# Altium PCB Power_BMS.PcbDoc (part 1 of 2)
Units mil, origin at the board's own origin, x right, y up, seen from the top; angles counter-clockwise.
Board outline 2370.27 x 1975.23 mil, 6 copper layers (Top Layer, Layer 1, GND, Power, Layer 2, Bottom Layer), stack 30.734 mil thick; 97 components, 67 nets, 345 pads, 132 vias.
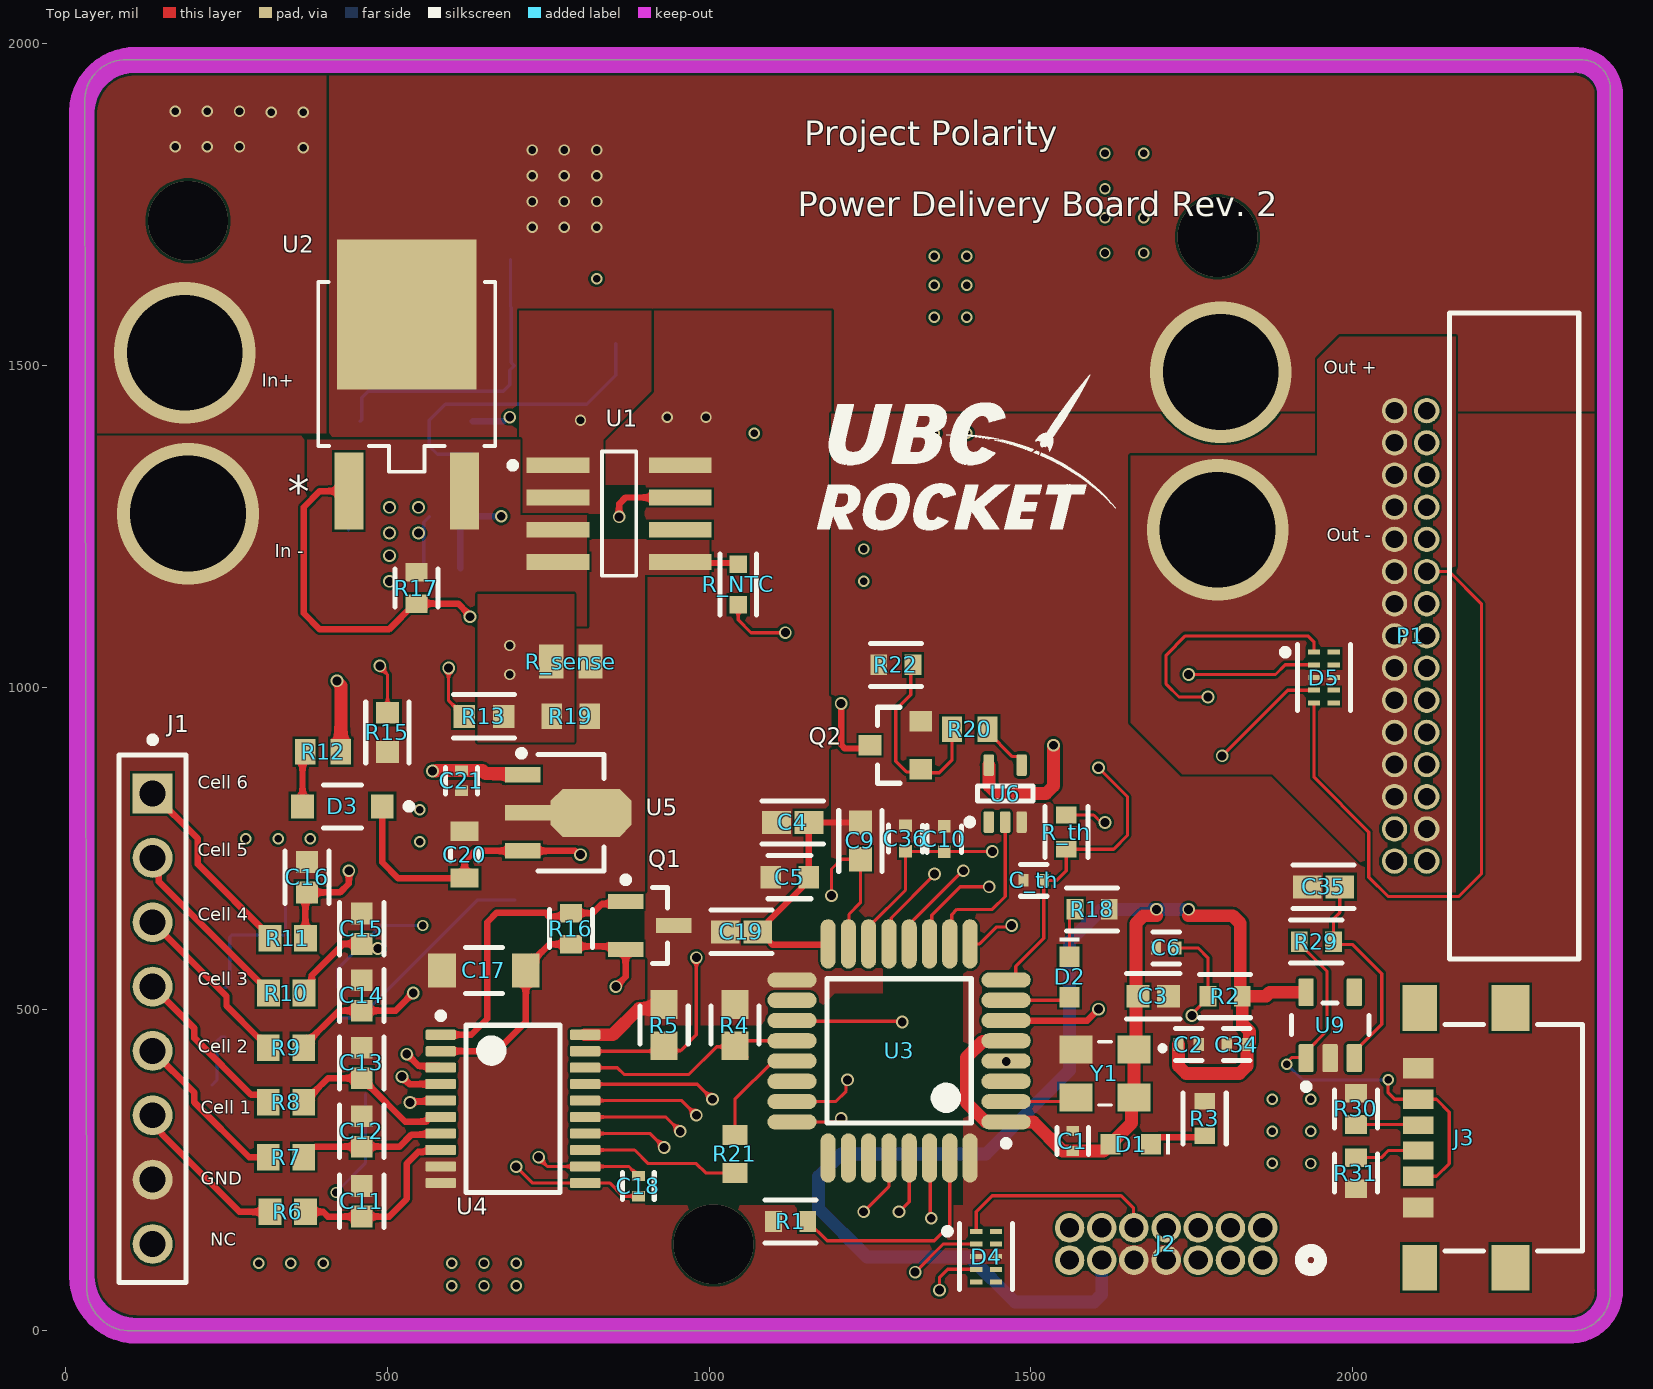
[diagram p0: Top Layer view]
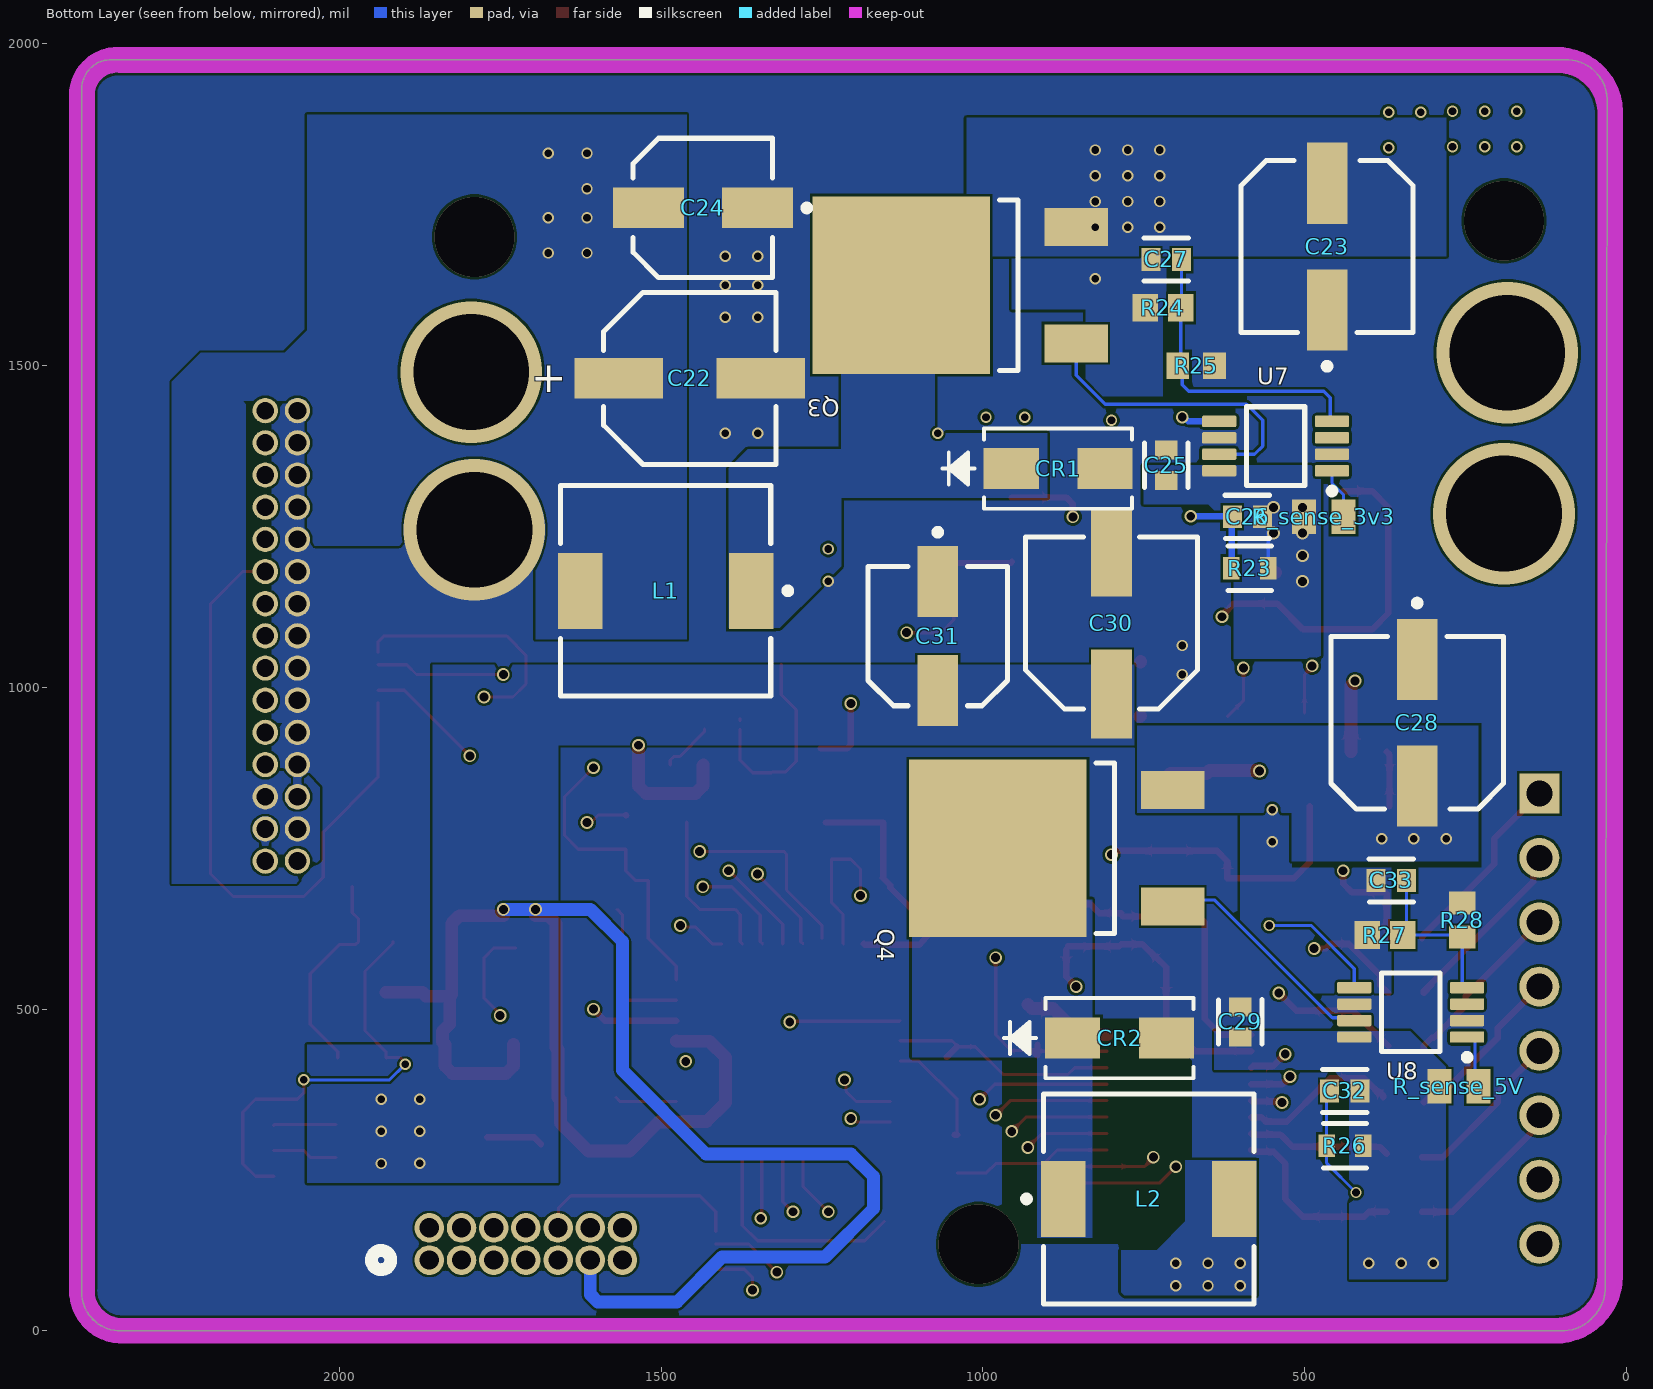
[diagram p1: Bottom Layer view, seen from below]
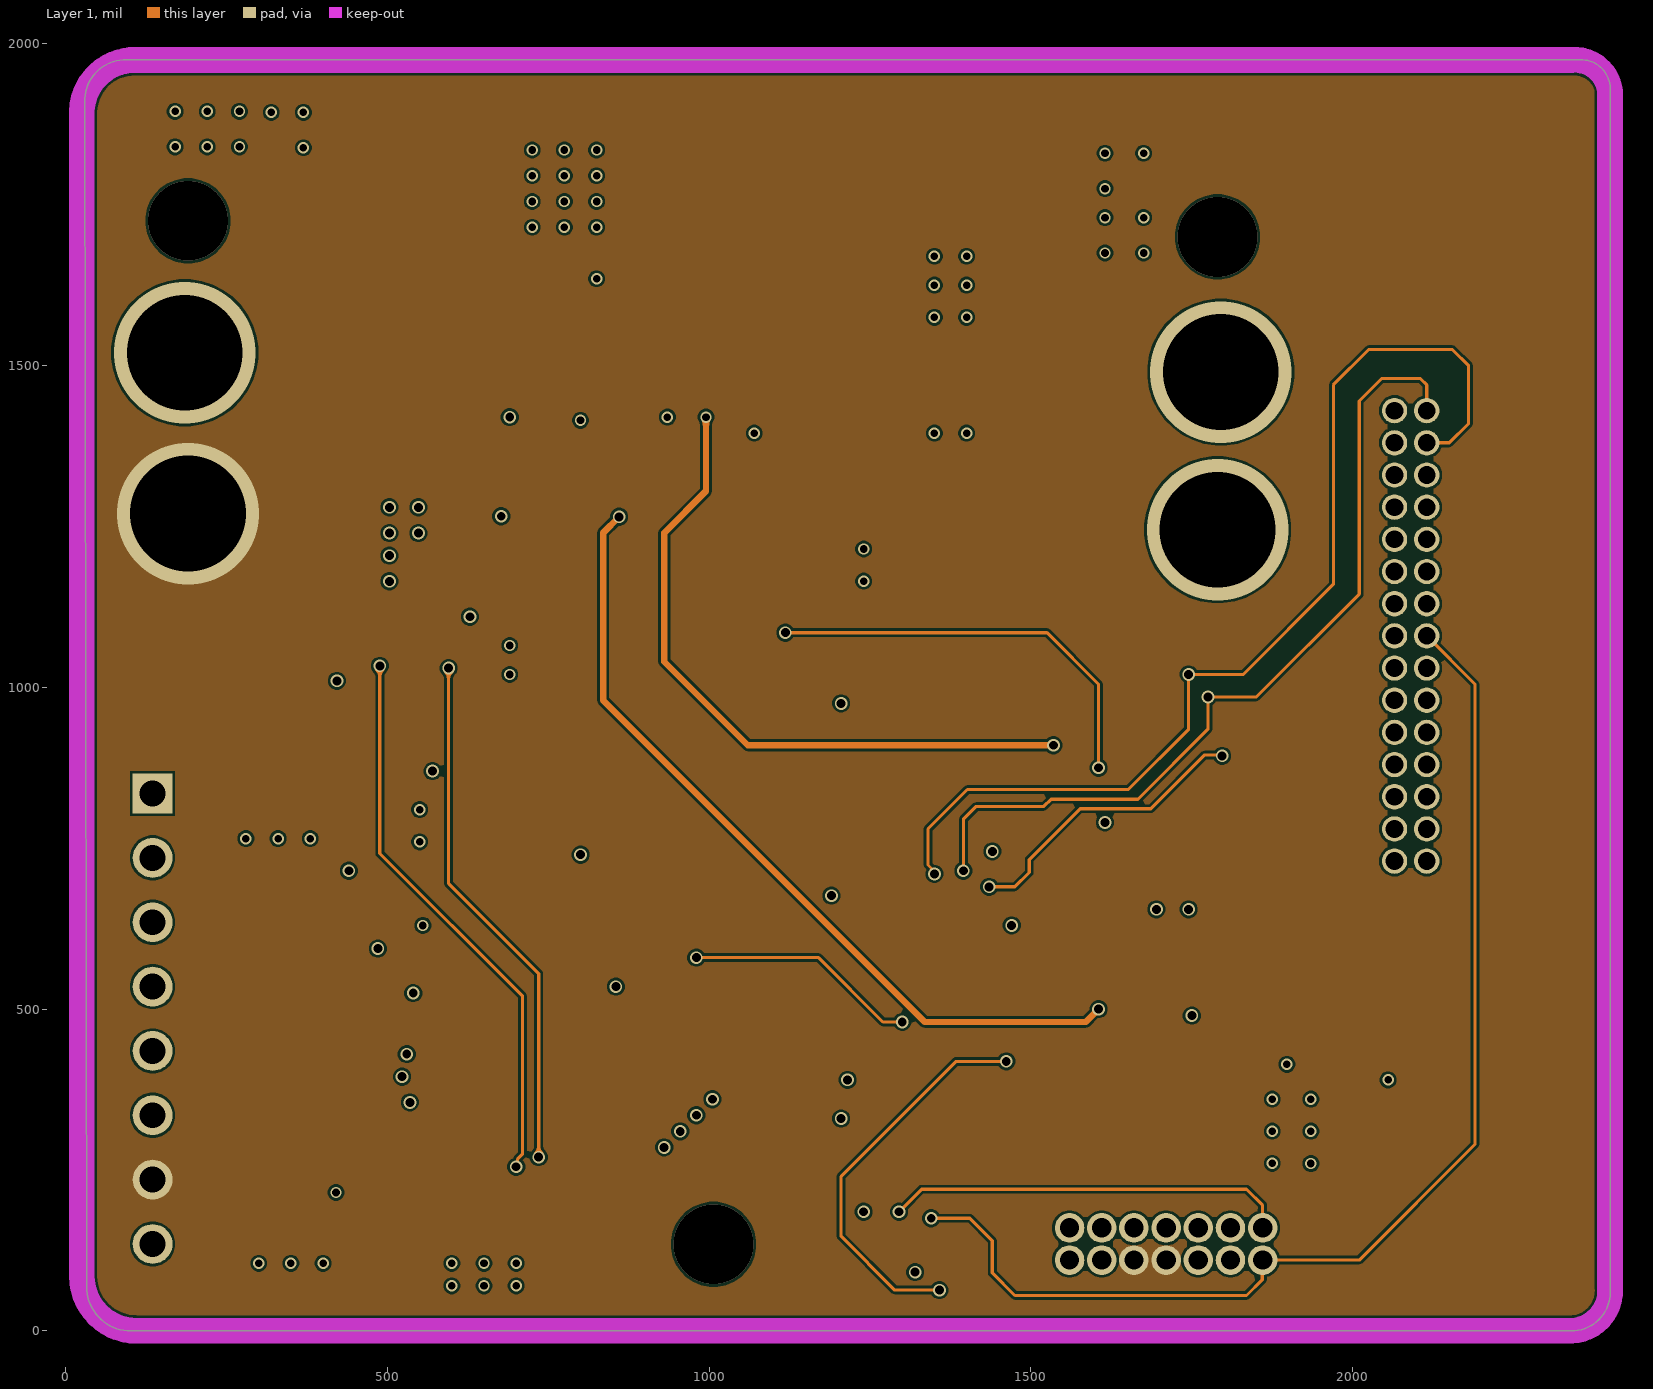
[diagram p2: Layer 1]
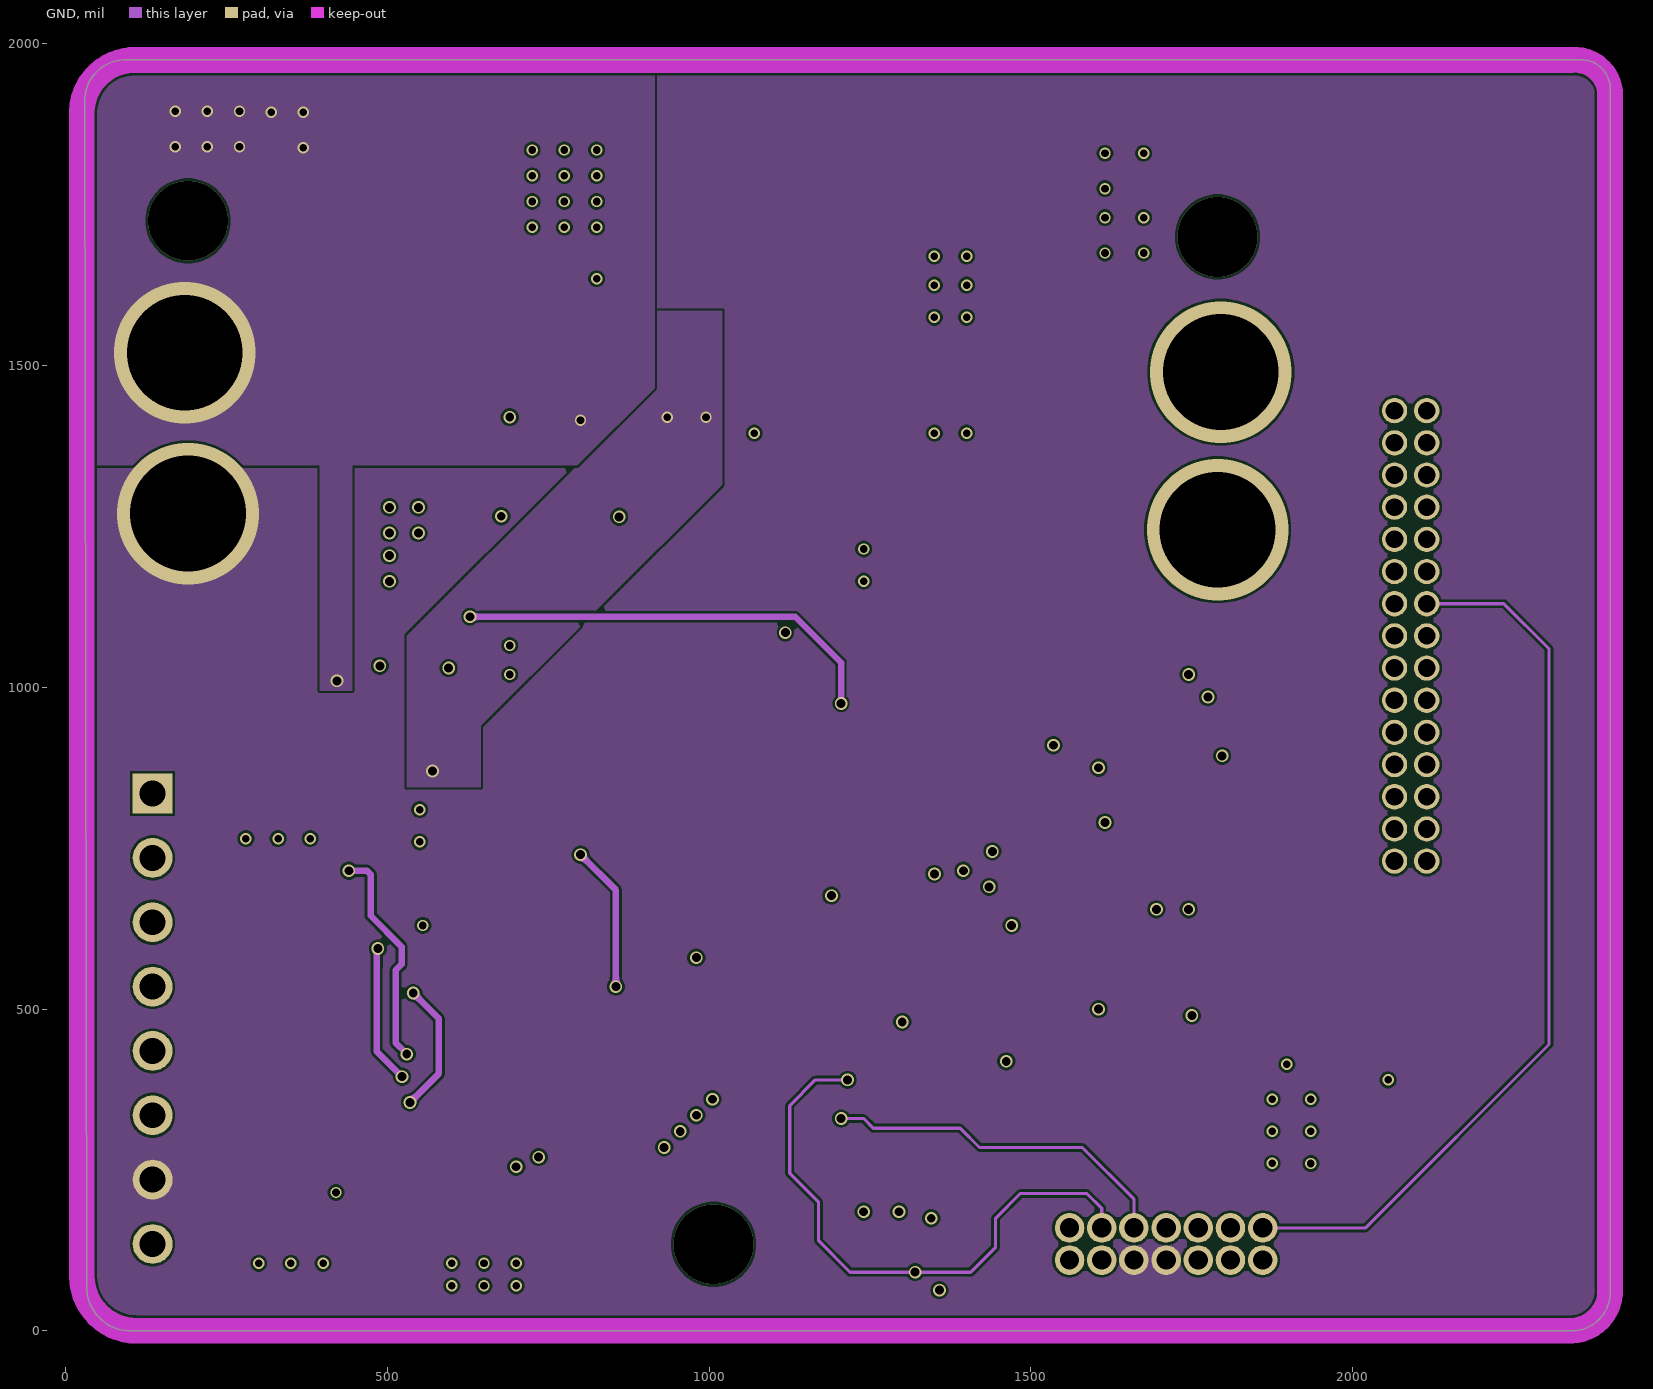
[diagram p3: GND]
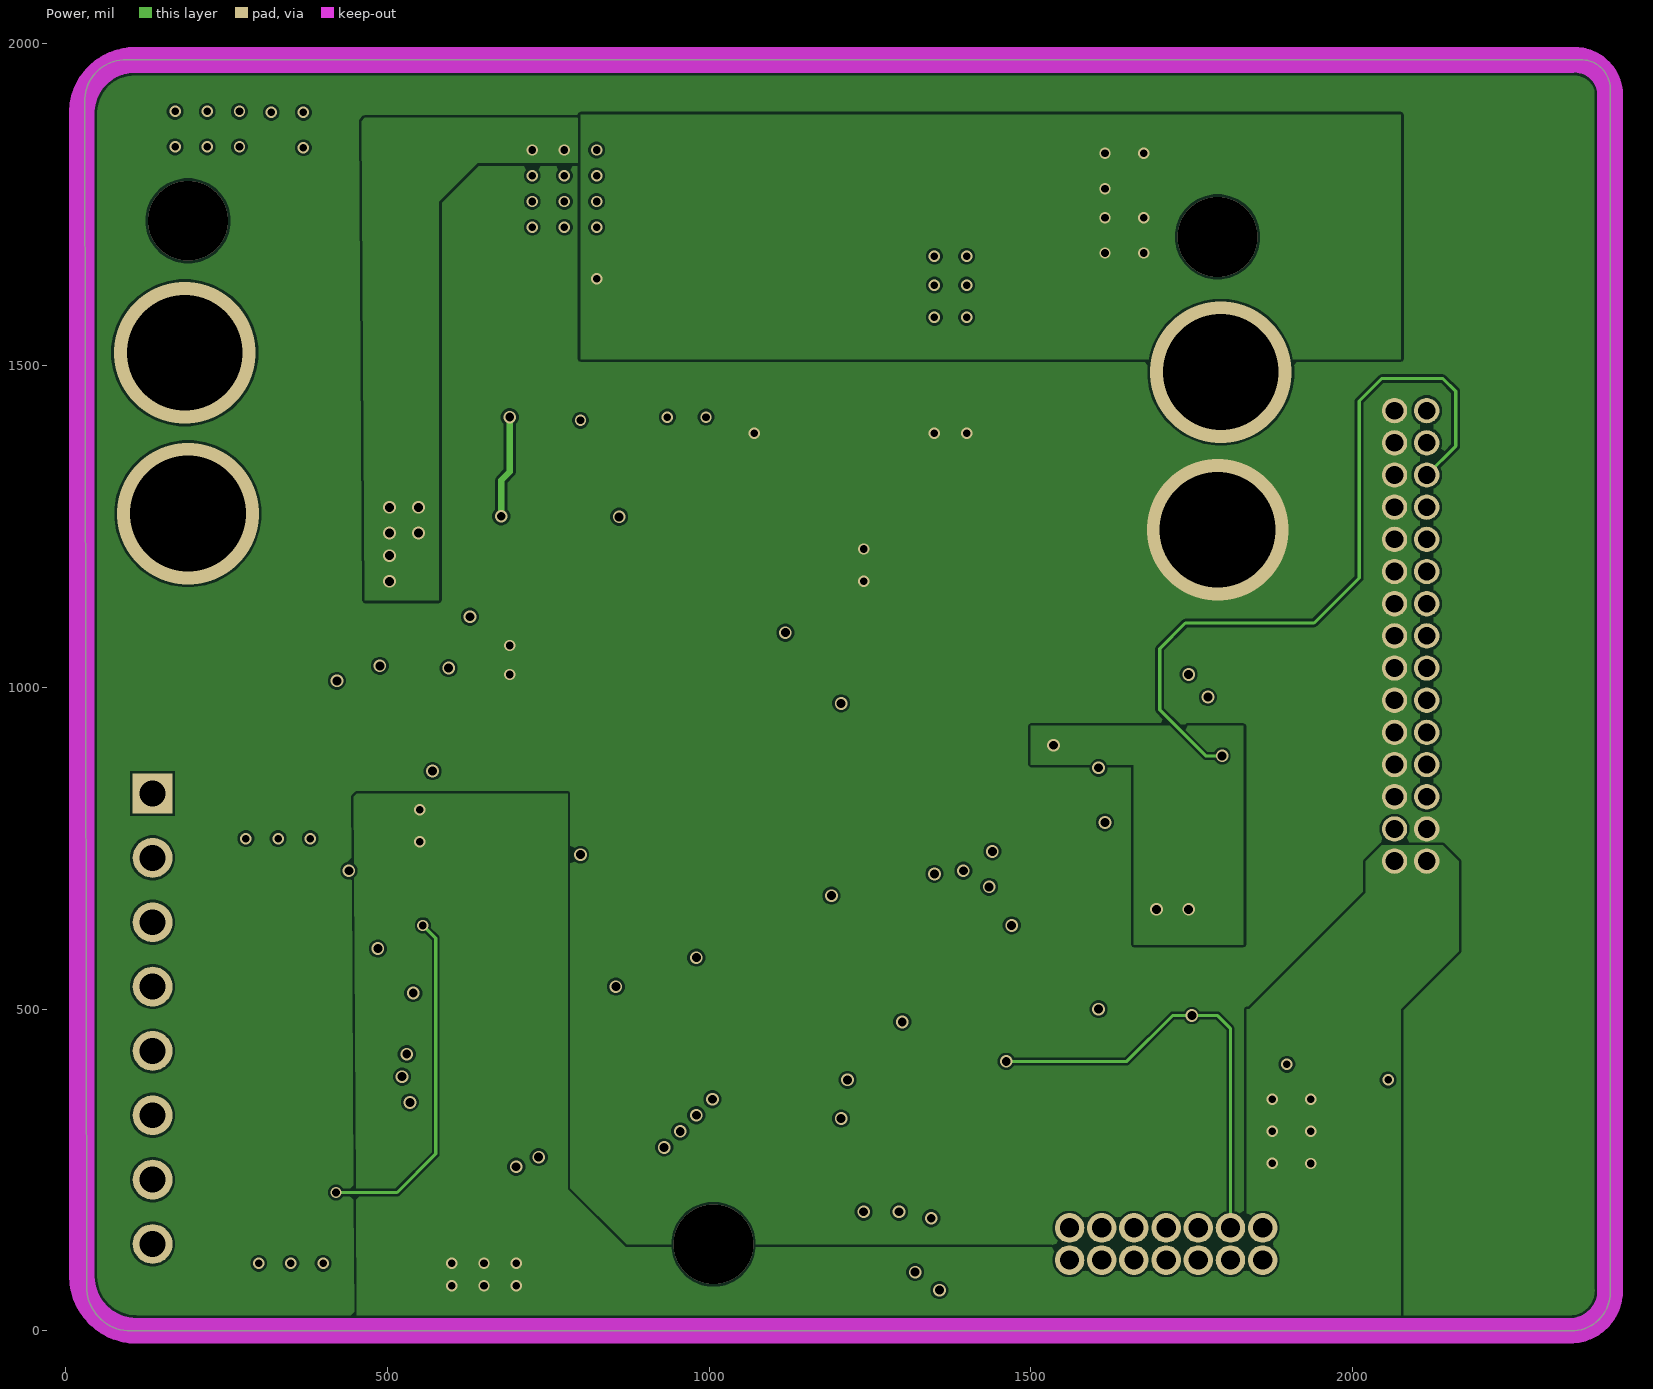
[diagram p4: Power]
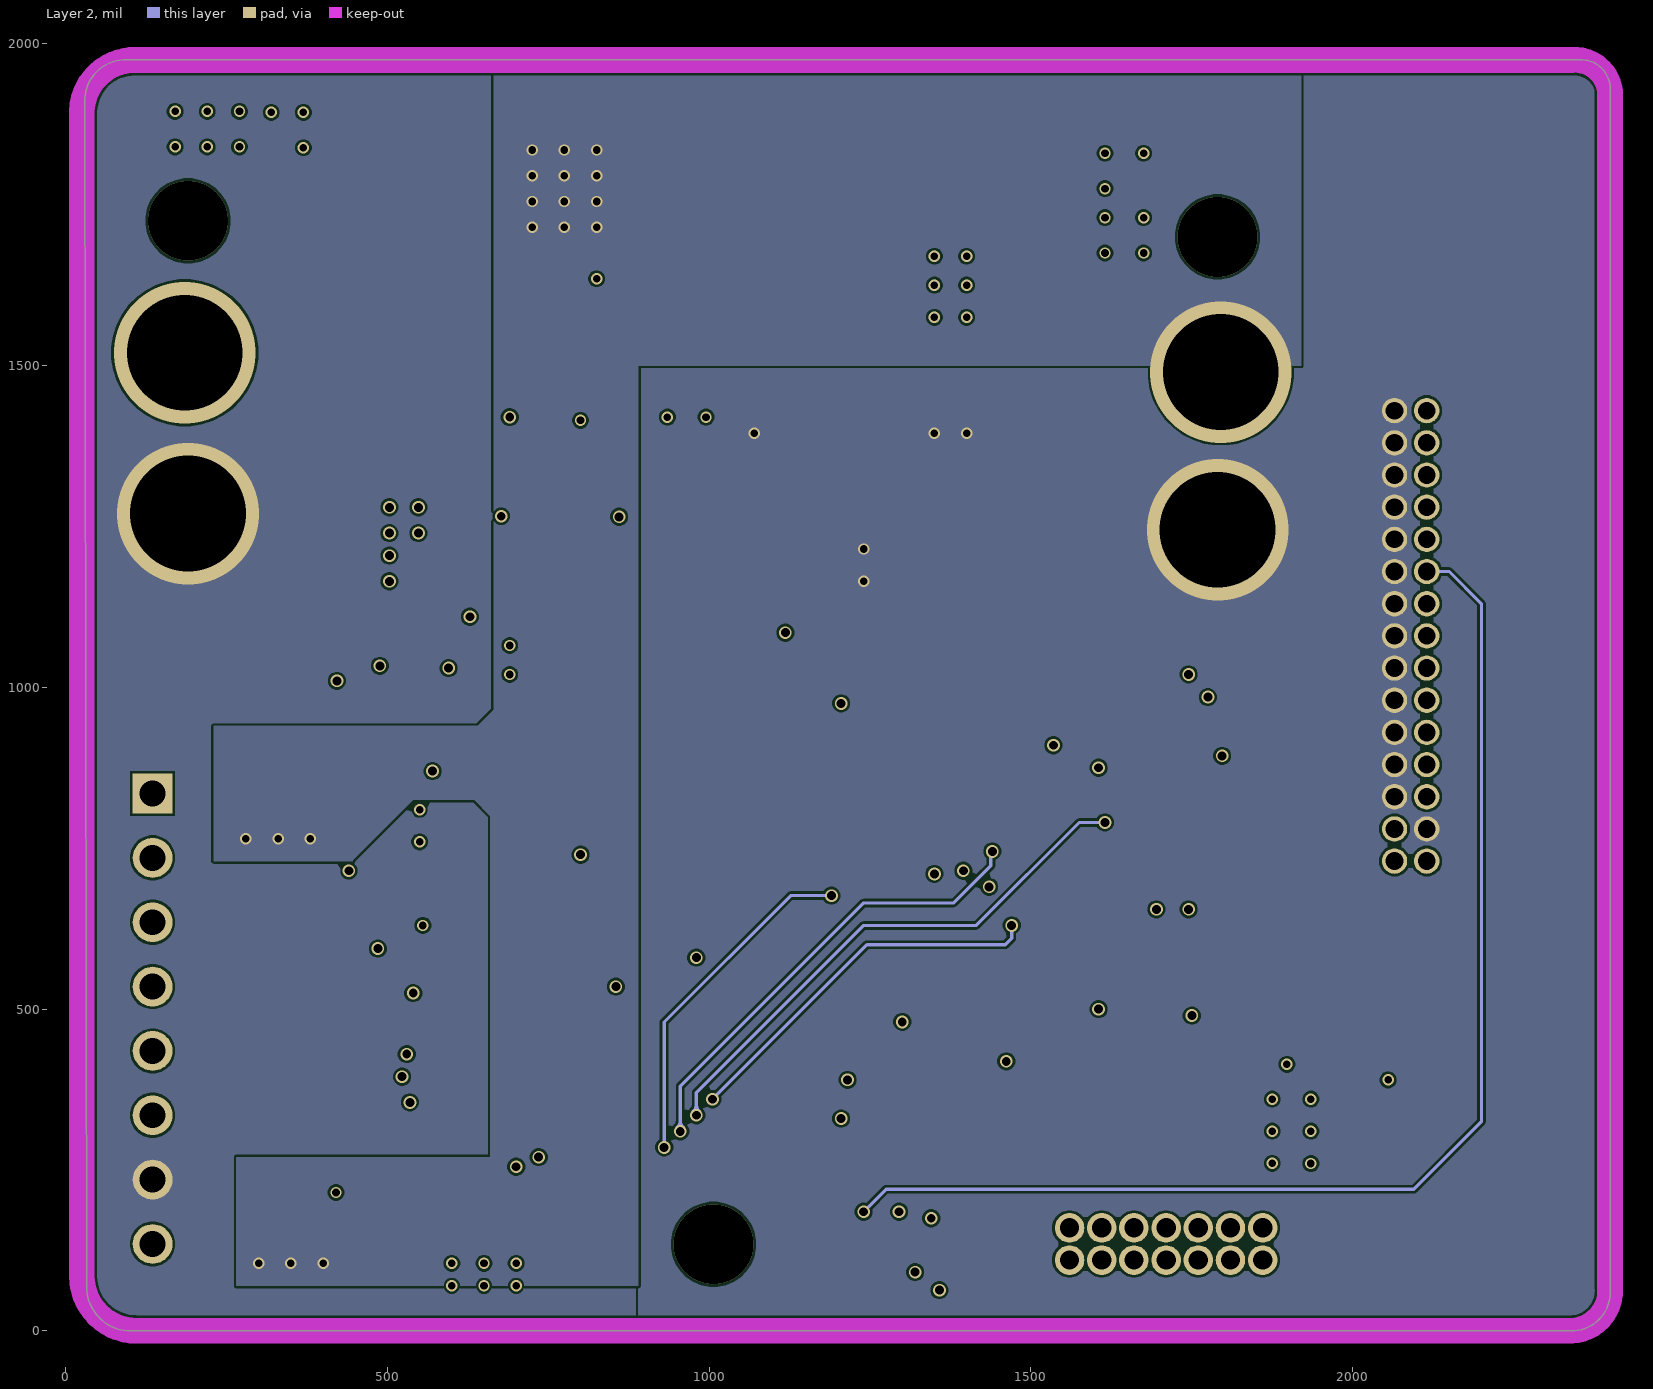
[diagram p5: Layer 2]
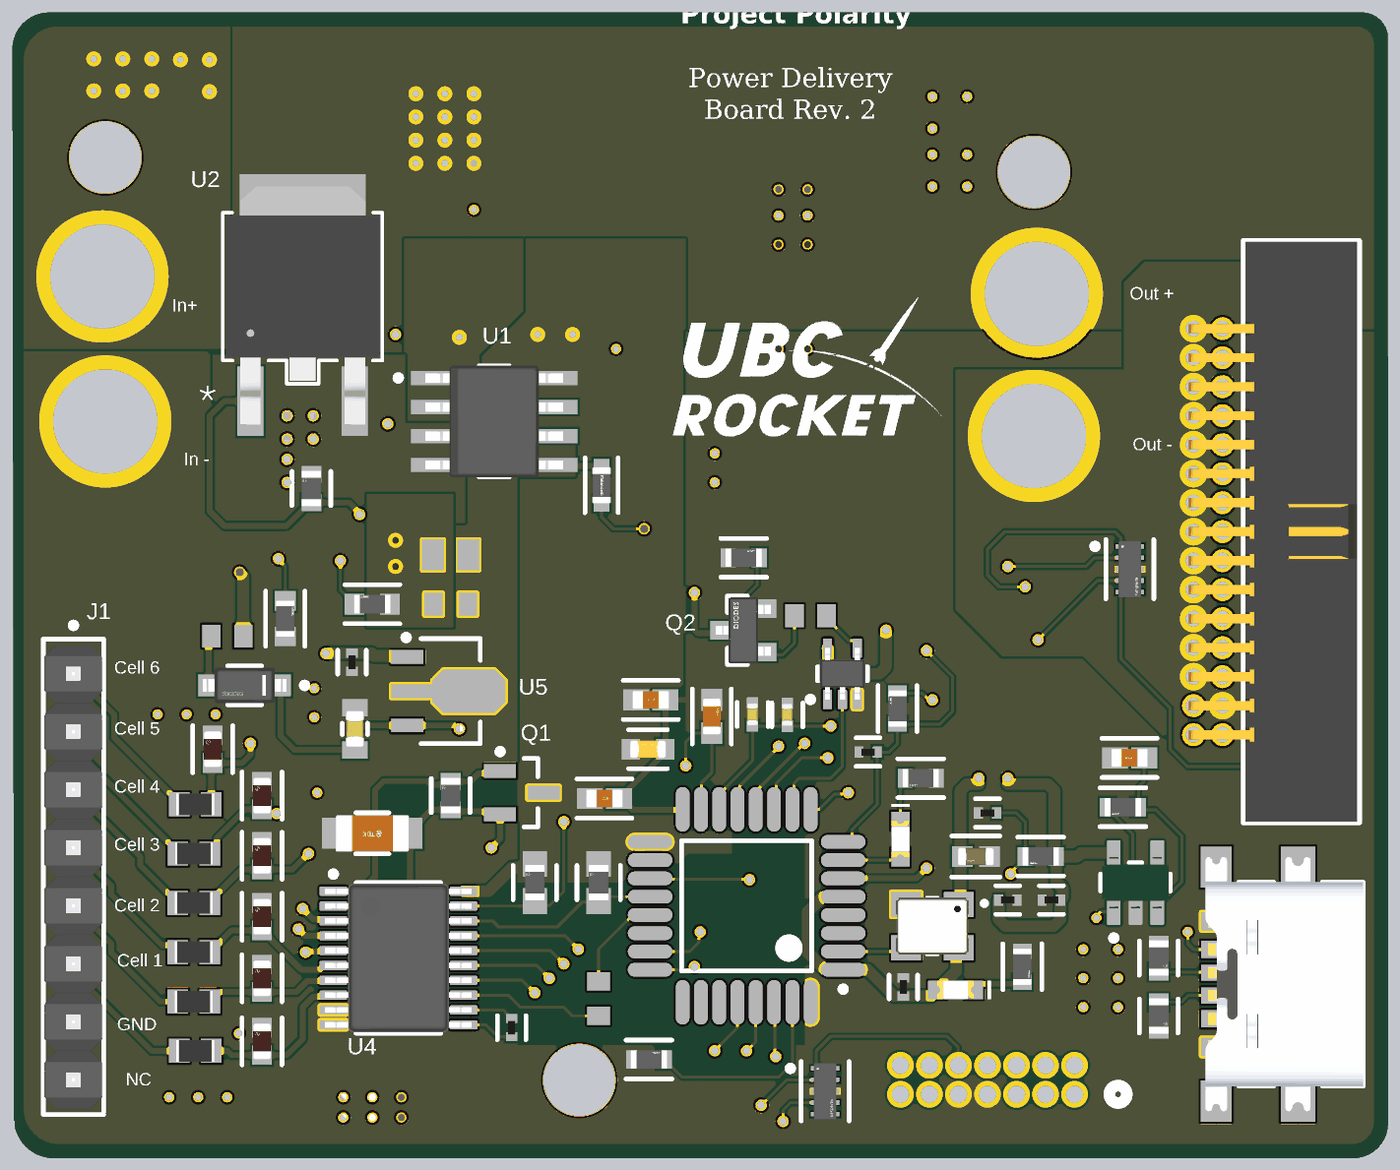
[diagram p7: 3D render of the assembled board from above, using the file's embedded part models]
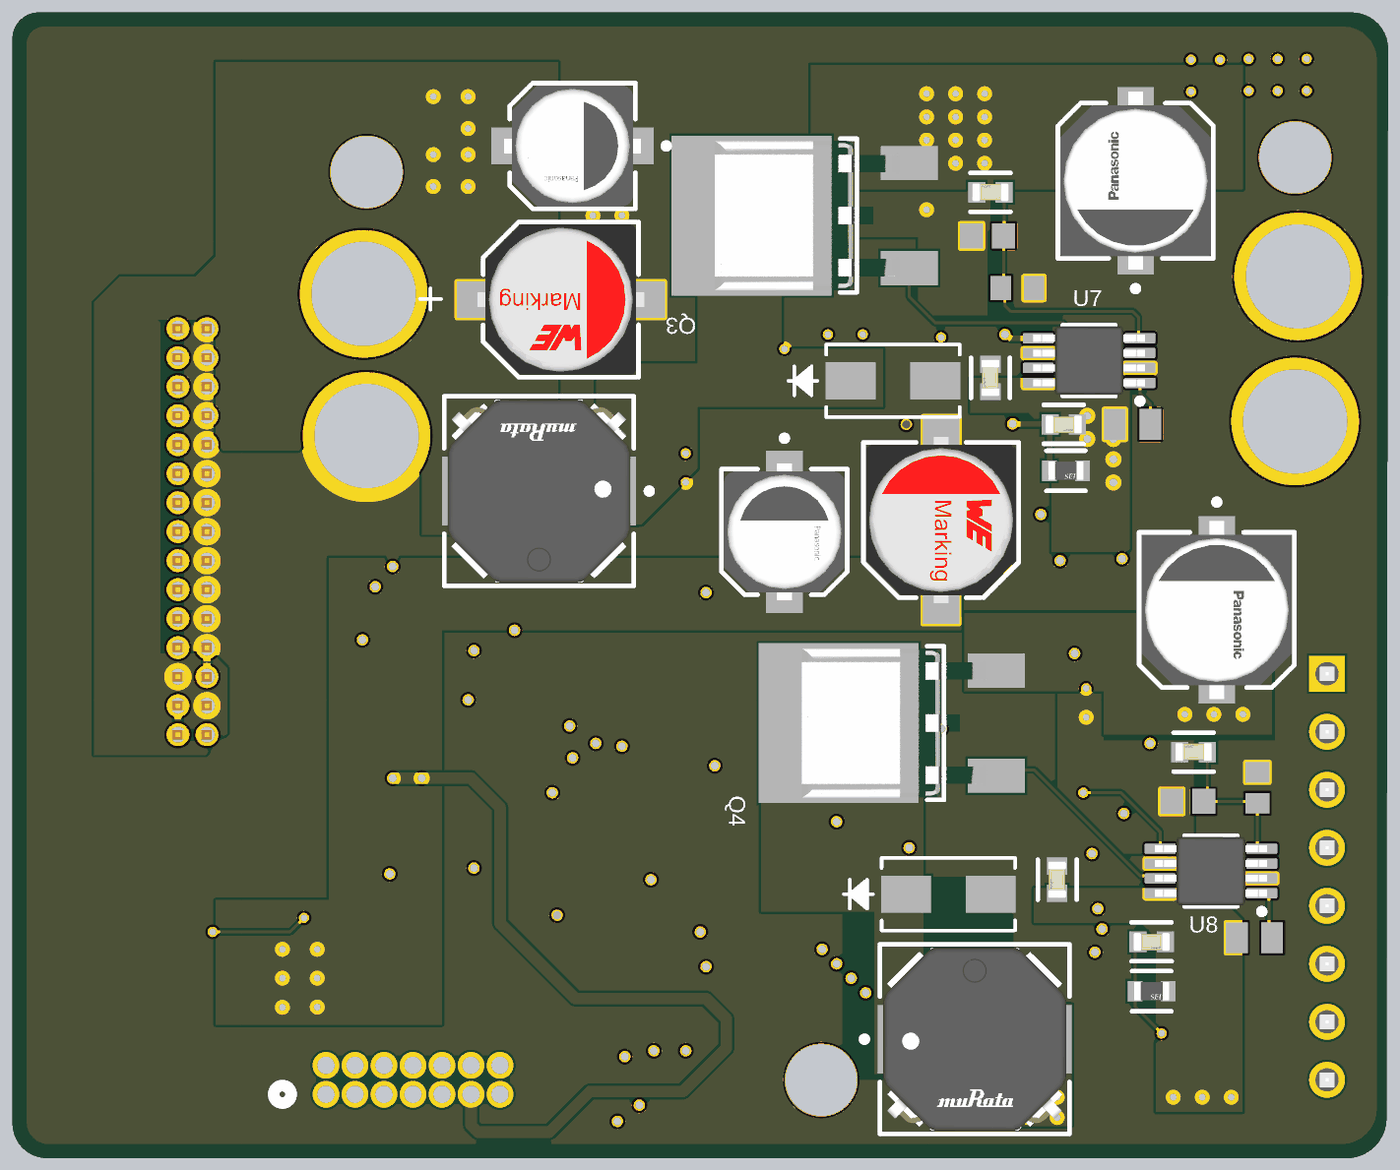
[diagram p8: 3D render of the assembled board from below, using the file's embedded part models]

## Layer stack, top to bottom
Top Solder: solder mask 0.4, Solder Resist, Dk 3.5
Top Layer: signal copper 1.4
Dielectric 4: prepreg 2.8, PP-006, Dk 4.1
Layer 1: signal copper 1.378
Dielectric 2: prepreg 2.8, PP-006, Dk 4.1
GND: signal copper 0.689
Dielectric 1: dielectric 12.6, FR-4, Dk 4.8
Power: signal copper 0.689
Dielectric 3: prepreg 2.8, PP-006, Dk 4.1
Layer 2: signal copper 1.378
Dielectric 5: prepreg 2.8, PP-006, Dk 4.1
Bottom Layer: signal copper 1.4
Bottom Solder: solder mask 0.4, Solder Resist, Dk 3.5

## Board outline
32.6,75 29.87,1915 cw(c92.41,1912.43) 94.98,1974.98 95,1975 2350,1975 cw(c2355,1930) 2400,1935 2400,65 cw(c2340,60) 2345,0 95.68,0 cw(c101.64,69.04)

## Design rules (kind name [scope] priority, off if disabled: settings)
Clearance Clearance_2 [All] p1: gap=3.9 ignorepadtopadclearanceinfootprint=FALSE
Clearance Clearance_1 [All] p2: gap=5 ignorepadtopadclearanceinfootprint=FALSE except(2: Arc-SMDPad Track-SMDPad SMDPad-SMDPad; 10: Arc-Arc Arc-Track Arc-Text Arc-Hole Track-Track Track-Text Track-Hole SMDPad-Text SMDPad-Hole THPad-Text THPad-Hole Via-Text Via-Hole Fill-Text Fill-Hole Poly-Text Poly-Hole Region-Text Region-Hole Text-Text Text-Hole)
Clearance [All] p3: gap=2 ignorepadtopadclearanceinfootprint=FALSE
HoleSize HoleSize_1 [All] p1: absolutevalues=TRUE maxlimit=100 minlimit=1 maxpercent=80.000 minpercent=20.000
HoleSize "Stitching Vias" [IsVia] p2: absolutevalues=TRUE maxlimit=100 minlimit=7.87 maxpercent=80.000 minpercent=20.000
MinimumSolderMaskSliver [All] p1: minsoldermaskwidth=2
PlaneConnect [InNet('Pack+')] p1: planeconnectstyle=Direct reliefexpansion=20 reliefentries=4 reliefconductorwidth=10 reliefairgap=10
PolygonConnect PolygonConnect_7 [InNet('5V_OUT') vs InNet('5V_OUT')] p1: connectstyle=Direct reliefconductorwidth=10 reliefentries=4 polygonreliefangle="90 Angle" airgapwidth=10
PolygonConnect PolygonConnect_6 [InNet('Pack-') vs InNet('Pack-')] p2: connectstyle=Direct reliefconductorwidth=10 reliefentries=4 polygonreliefangle="90 Angle" airgapwidth=10
PolygonConnect PolygonConnect_5 [InNet('3v3_OUT') vs InNet('3v3_OUT')] p3: connectstyle=Direct reliefconductorwidth=10 reliefentries=4 polygonreliefangle="90 Angle" airgapwidth=10
PolygonConnect PolygonConnect_4 [InNet('+3V3') vs InNet('+3V3')] p4: connectstyle=Direct reliefconductorwidth=10 reliefentries=4 polygonreliefangle="90 Angle" airgapwidth=10
PolygonConnect PolygonConnect_3 [InNet('Pack+ Sensor Out') vs InNet('Pack+ Sensor Out')] p5: thpad.connectstyle=Direct thpad.reliefconductorwidth=10 thpad.reliefentries=4 thpad.polygonreliefangle="90 Angle" thpad.airgapwidth=10 smdpad.connectstyle=Direct smdpad.reliefconductorwidth=10 smdpad.reliefentries=4 smdpad.polygonreliefangle="90 Angle" smdpad.airgapwidth=10 via.connectstyle=Relief via.reliefconductorwidth=10 via.reliefentries=4 via.polygonreliefangle="90 Angle" via.airgapwidth=10
PolygonConnect PolygonConnect_2 [InNet('VIN') vs InNet('VIN')] p6: connectstyle=Direct reliefconductorwidth=10 reliefentries=4 polygonreliefangle="90 Angle" airgapwidth=10
PolygonConnect PolygonConnect_1 [(InNet('3v3_OUT') OR InNet('+3V3') OR InNet('5V_OUT') OR InNet('GND') OR InNet('NetCR1_1') OR InNet('NetCR2_1') OR InNet('VIN') OR InNet('Pack+') OR InNet('Pack+ Sensor Out') OR InNet('Pack-')) vs (InNet('3v3_OUT') OR InNet('+3V3') OR InNet('5V_OUT') OR InNet('GND') OR InNet('NetCR1_1') OR InNet('NetCR2_1') OR InNet('VIN') OR InNet('Pack+') OR InNet('Pack+ Sensor Out') OR InNet('Pack-'))] p7: connectstyle=Direct reliefconductorwidth=10 reliefentries=4 polygonreliefangle="90 Angle" airgapwidth=10
PolygonConnect [InNet('Pack+') vs InNet('Pack+')] p8: connectstyle=Direct reliefconductorwidth=10 reliefentries=4 polygonreliefangle="90 Angle" airgapwidth=10
RoomDefinition BMS_Rocket [InComponentClass('BMS_Rocket')] p1: confinementstyle=ConfineIn formatcopy=TRUE lockcomponents=FALSE outline -450,-185 4590,-185 4590,2280 -450,2280
RoutingVias [All] p1: holewidth=28 width=50 viastyle="Through Hole" minholewidth=28 minwidth=50 maxholewidth=28 maxwidth=50
SilkToSilkClearance [All] p1: silktosilkclearance=5
SolderMaskExpansion [All] p1: expansion=4 istentingtop=FALSE
SupplyNets "Schematic Supply Nets_3" [InNet('GND')] p1: voltage=0.000
SupplyNets "Schematic Supply Nets" [InNet('+3V3')] p2: voltage=0.000
SupplyNets "Schematic Supply Nets_5" [InNet('Pack+')] p3: voltage=0.000
SupplyNets "Schematic Supply Nets_4" [InNet('VIN')] p4: voltage=0.000
SupplyNets "Schematic Supply Nets_2" [InNet('Pack+ Sensor Out')] p5: voltage=0.000
SupplyNets "Schematic Supply Nets_1" [InNet('Pack-')] p6: voltage=0.000
Width Width_1 [(InNet('3v3_OUT') OR InNet('5V_OUT'))] p1: maxlimit=40 minlimit=40 preferedwidth=40
Width Width_+3V3 [InNet('+3V3')] p2: maxlimit=40 minlimit=10 preferedwidth=30 toplayer_minwidth=20 midlayer1_minwidth=20 midlayer2_minwidth=20 midlayer3_maxwidth=10 midlayer3_prefwidth=10 midlayer4_maxwidth=10 midlayer4_prefwidth=10 bottomlayer_minwidth=20 minimp=50.000000 maximp=50.000000 favimp=50.000000
Width Width_Pack [(InNet('Pack-') OR InNet('Pack+') OR InNet('Pack+ Out') OR InNet('Pack+ Sensor Out'))] p3: maxlimit=100 minlimit=10 preferedwidth=30 toplayer_minwidth=20 toplayer_prefwidth=50 midlayer1_minwidth=20 midlayer1_maxwidth=40 midlayer2_minwidth=20 midlayer2_maxwidth=40 midlayer3_maxwidth=10 midlayer3_prefwidth=10 midlayer4_maxwidth=10 midlayer4_prefwidth=10 bottomlayer_minwidth=20 bottomlayer_maxwidth=40 minimp=50.000000 maximp=50.000000 favimp=50.000000
Width Width_Cell [(InNet('Cell_1') OR InNet('Cell_2') OR InNet('Cell_3') OR InNet('Cell_4') OR InNet('Cell_5') OR InNet('Cell_6') OR InNet('NetJ1_6') OR InNet('NetJ1_5') OR InNet('NetJ1_4') OR InNet('NetJ1_3') OR InNet('NetJ1_2') OR InNet('NetJ1_1'))] p4: maxlimit=25 minlimit=10 preferedwidth=10 toplayer_prefwidth=20 midlayer1_maxwidth=10 midlayer2_maxwidth=10 midlayer3_maxwidth=10 midlayer4_maxwidth=10 bottomlayer_prefwidth=20 minimp=50.000000 maximp=50.000000 favimp=50.000000
Width [All] p5: maxlimit=10 minlimit=5 preferedwidth=10
26 further rules are at their usual default settings.

## Classes and differential pairs
component class USB: C35 J3 R29 R30 R31 U9
component class Ribbon_Cable_Connector: D5 P1
component class Buck_Converter: C22 C23 C24 C25 C26 C27 C28 C29 C30 C31 C32 C33 CR1 CR2 L1 L2 Q3 Q4 R23 R24 R25 R26 R27 R28 R_sense_3v3 R_sense_5V U7 U8
component class BMS_Rocket: C1 C2 C3 C4 C5 C6 C9 C10 C11 C12 C13 C14 C15 C16 C17 C18 C19 C20 C21 C34 C36 C_th D1 D2 D3 D4 J1 J2 Q1 Q2 R1 R2 R3 R4 R5 R6 R7 R8 R9 R10 R11 R12 R13 R15 R16 R17 R18 R19 R20 R21 R22 R_NTC R_sense R_th U1 U2 U3 U4 U5 U6 Y1

## Components (designator, comment, footprint, x,y, rotation, side; value= is the part's Value field where it differs from the comment)
C1 "GRM155R71C104KA88D" FP-GRM15-MFG 1565,295 r270 top value=0.10μF
C2 "GRM155R71C104KA88D" FP-GRM15-MFG 1745,445 r180 top value=0.10μF
C3 "GRM188R6YA475KE15D" FP-GRM188-0_2-IPC_C 1690,520 r180 top
C4 "C1608X5R1H105K080AB" FP-C1608-080-0_1-IPC_B 1129.78,790 r180 top
C5 "CC0603KRX7R9BB103" FP-CC0603-DA-MFG 1125,705 r180 top value="10 nF"
C6 "GRM155R71C104KA88D" FP-GRM15-MFG 1710,595 r0 top value=0.10μF
C9 "GRM1885C1H202JA01D" FP-GRM188-0_1-e0_2_0_5-IPC_B 1235,761.39 r90 top
C10 "CC0402KRX7R8BB102" FP-CC0402-MFG 1365,764.25 r90 top value="1.0 nF"
C11 "UMK107AB7105KA-T" FP-0603-L_1_6_0_15-W_0_8-IPC_C 460,201.29 r90 top
C12 "UMK107AB7105KA-T" FP-0603-L_1_6_0_15-W_0_8-IPC_C 460,310 r90 top
C13 "UMK107AB7105KA-T" FP-0603-L_1_6_0_15-W_0_8-IPC_C 460,416.29 r90 top
C14 "UMK107AB7105KA-T" FP-0603-L_1_6_0_15-W_0_8-IPC_C 460,521.29 r90 top
C15 "UMK107AB7105KA-T" FP-0603-L_1_6_0_15-W_0_8-IPC_C 460,625 r90 top
C16 "UMK107AB7105KA-T" FP-0603-L_1_6_0_15-W_0_8-IPC_C 375,705 r90 top
C17 "C3216X5R1H106M160AB" FP-C3216-160-0_2-MFG 650,560 r180 top
C18 "GRM155R71C104KA88D" FP-GRM15-MFG 890,225 r90 top value=0.10μF
C19 "C1608X5R1H105K080AB" FP-C1608-080-0_1-IPC_B 1050,620 r180 top
C20 "CGA3E3X7R1H334K080AB" FP-CGA3E-0_3-0_1-IPC_B 620,740 r90 top
C21 "GRM155R71C104KA88D" FP-GRM15-MFG 615,855 r90 top value=0.10μF
C22 "865080545012" WCAP-ASLI_D6.3H7.7 1455.24,1480 r0 bottom
C23 "EEEFK1H220P" FP-FKD-MFG 465,1685 r90 bottom
C24 "EEE-FK1H100UR" FP-FKC-MFG 1435,1745 r0 bottom
C25 "C0603C104K5RACTU" FP-C0603C-CF-MFG 715,1345 r90 bottom value="0.10 μF"
C26 "C0603C104M5RACAUTO" FP-C0603C-CF-MFG 588.62,1265 r0 bottom value="0.10 μF"
C27 "C0603C101J5GACTU" FP-C0603C-CF-MFG 715,1665 r180 bottom value="100 pF"
C28 "EEEFK1H220P" FP-FKD-MFG 325,945 r270 bottom
C29 "C0603C104K5RACTU" FP-C0603C-CF-MFG 600,480 r90 bottom value="0.10 μF"
C30 "865080545012" WCAP-ASLI_D6.3H7.7 800,1100 r270 bottom
C31 "EEE-FK1H100UR" FP-FKC-MFG 1070,1079.65 r270 bottom
C32 "C0603C104M5RACAUTO" FP-C0603C-CF-MFG 437.2,372.8 r0 bottom value="0.10 μF"
C33 "C0603C101J5GACTU" FP-C0603C-CF-MFG 365,700 r180 bottom value="100 pF"
C34 "GRM155R71C104KA88D" FP-GRM15-MFG 1820,445 r0 top value=0.10μF
C35 "C1608X5R1H105K080AB" FP-C1608-080-0_1-IPC_B 1954.78,690 r0 top
C36 "CC0402KRX7R8BB102" FP-CC0402-MFG 1305,765 r90 top value="1.0 nF"
C_th "GRM155R71C104KA88D" FP-GRM15-MFG 1504.25,700 r0 top value=0.10μF
CR1 "B340AE-13" CR_SMA_320-340AE_DIO 883,1340 r180 bottom
CR2 "B340AE-13" CR_SMA_320-340AE_DIO 787.5,455 r180 bottom
D1 "150060VS75000" WL-SMCW_0603_150060xx75000 1655,290 r180 top
D2 "150060SS75000" WL-SMCW_0603_150060xx75000 1560,550 r270 top
D3 "B0520LW-7-F" FP-SOD123-MFG 430,815 r180 top value=170pF
D4 "PUSB3FR4Z" FP-SOT1176-1-MFG 1430.26,115.32 r90 top
D5 "PUSB3FR4Z" FP-SOT1176-1-MFG 1955.26,1015.32 r90 top
J1 "M20-9990846" FP-M20-9990846-MFG 135,485 r270 top
J2 "3220-14-0100-00" CONN14_3220-14_CNC 1860,110 r180 top
J3 "USB4135-GF-A_REVA" GCT_USB4135-GF-A_REVA 2245,300 r90 top
L1 "1217AS-H-150M=P3" FP-DEM8045C-MFG 1492.87,1150 r0 bottom
L2 "1217AS-H-150M=P3" FP-DEM8045C-MFG 742.13,205 r180 bottom
P1 "62703021721" 62703021721 2250.83,1080 r90 top
Q1 "BSS84AK,215" NXP-SOT23_N 907.6,630 r0 top
Q2 "2N7002-7-F" FP-SOT23-MFG 1289.37,910 r180 top
Q3 "IRFR9024NTRPBF" FP-PG-TO252-3-MFG 1035,1625 r90 bottom
Q4 "IRFR9024NTRPBF" FP-PG-TO252-3-MFG 885,750 r90 bottom
R1 "RC0603FR-0710KL" FP-RC0603-0_55-IPC_C 1126.64,170 r0 top
R2 "RC0603FR-0710KL" FP-RC0603-0_55-IPC_C 1801.64,520 r180 top
R3 "RC0603FR-0710KL" FP-RC0603-0_55-IPC_C 1770,330 r270 top
R4 "CRCW06034K70FKEA" FP-CRCW0603-e3-IPC_A 1040,475 r90 top
R5 "CRCW06034K70FKEA" FP-CRCW0603-e3-IPC_A 930,475 r90 top
R6 "CRCW0603100RFKEA" RESC1609X50X30ML8T20 345,185 r0 top
R7 "CRCW0603100RFKEA" RESC1609X50X30ML8T20 342.44,270 r0 top
R8 "CRCW0603100RFKEA" RESC1609X50X30ML8T20 342.44,355 r0 top
R9 "CRCW0603100RFKEA" RESC1609X50X30ML8T20 342.44,440 r0 top
R10 "CRCW0603100RFKEA" RESC1609X50X30ML8T20 342.56,525 r0 top
R11 "CRCW0603100RFKEA" RESC1609X50X30ML8T20 345,610 r0 top
R12 "RK73B1JTTD111J" RESC1608X55X30NL20T10 400,900 r180 top
R13 "AC0603FR-071KL" FP-AC0603-IPC_B 650,955 r180 top
R15 "AC0603FR-071KL" FP-AC0603-IPC_B 500,930 r90 top
R16 "CRCW0603200KFKEA" FP-CRCW0603-e3-IPC_C 785,625 r90 top
R17 "CRCW0603200KFKEA" FP-CRCW0603-e3-IPC_C 545,1154.4 r90 top
R18 "RC0603FR-0710KL" FP-RC0603-0_55-IPC_C 1595,655 r180 top
R19 "RC0603JR-070RL" RESC1608X55X25ML10T15 785,955 r180 top
R20 "RK73B1JTTD111J" RESC1608X55X30NL20T10 1405,935 r180 top
R21 "RC0603JR-070RL" RESC1608X55X25ML10T15 1040,275 r270 top
R22 "RC0603FR-0710KL" FP-RC0603-0_55-IPC_C 1290,1035 r0 top
R23 "RMCF0603FT182K" FP-RMCF0603-MFG 585,1185 r180 bottom
R24 "ERA3AEB333V" RESC1608X55X30ML20T20 720,1590 r0 bottom
R25 "ERJ-3EKF2002V" RESC1608X55X30ML15T15 668.54,1500 r0 bottom
R26 "RMCF0603FT182K" FP-RMCF0603-MFG 437.2,287.8 r180 bottom
R27 "ERA3AEB333V" RESC1608X55X30ML20T20 375,615 r0 bottom
R28 "CRCW060311K0FKEA" RESC1609X50X30ML10T20 255,638.43 r270 bottom
R29 "RC0603FR-0710KL" FP-RC0603-0_55-IPC_C 1943.36,605 r180 top
R30 "CRCW06035K10FKEA" FP-CRCW0603-e3-IPC_C 2005,345 r270 top
R31 "CRCW06035K10FKEA" FP-CRCW0603-e3-IPC_C 2005,245 r270 top
R_NTC "ERT-J1VG103FA" FP-ERTJ1-MFG 1045,1160 r270 top
R_sense "RL1220S-R15-F" RESC2013X50X40LL20T20 785,1040 r180 top
R_sense_3v3 "RL1220S-R15-F" RESC2013X50X40LL20T20 470,1265 r180 bottom
R_sense_5V "RL1220S-R15-F" RESC2013X50X40LL20T20 260,380 r180 bottom
R_th "RC0603FR-0710KL" FP-RC0603-0_55-IPC_C 1555,775 r90 top
U1 "TMCS1108A4BQDR" D0008A-IPC_A 860,1270 r0 top
U2 "FQD11P06TM" TO-252-3_ONS 529.96,1502.5 r0 top
U3 "STM32F030K6T6TR" STM-LQFP32_M 1295,435 r180 top
U4 "BQ76925PWR" PW0020A_L 695,345 r0 top
U5 "L78L33ABUTR" SOT-89_N 785,805 r0 top
U6 "SN74LVC1G04DCKR" DCK0005A_N 1460,835 r90 top
U7 "LM3489MMX/NOPB" DGK0008A_N 545,1375 r0 bottom
U8 "LM3489MMX/NOPB" DGK0008A_N 335,495 r0 bottom
U9 "TLV73333PDBVR" FP-DBV0005A-MFG 1965,475 r90 top
Y1 "ECS-3225MV-080-BN-TR" OSC_ECS-3225MV-080-BN-TR 1615,400 r180 top

## Footprints (in the part's own frame and the unit in brackets; to place one, negate y for a bottom-side part, rotate by r counter-clockwise, add the part's x,y. Pads: shape width x height; smd on the part's side, far side on the other; paste and mask are expansions set on the pad)
62703021721 [mm] "1.27x1.27mm Pitch Box Header Right Angle Type, 30p"
  round 1 hole 0.7: 1(8.89,4.72) 2(8.89,3.45) 3(7.62,4.72) 4(7.62,3.45) 5(6.35,4.72) 6(6.35,3.45) 7(5.08,4.72) 8(5.08,3.45) 9(3.81,4.72) 10(3.81,3.45) 11(2.54,4.72) 12(2.54,3.45) 13(1.27,4.72) 14(1.27,3.45) 15(0,4.72) 16(0,3.45) 17(-1.27,4.72) 18(-1.27,3.45) 19(-2.54,4.72) 20(-2.54,3.45) 21(-3.81,4.72) 22(-3.81,3.45) 23(-5.08,4.72) 24(-5.08,3.45) 25(-6.35,4.72) 26(-6.35,3.45) 27(-7.62,4.72) 28(-7.62,3.45) 29(-8.89,4.72) 30(-8.89,3.45)
  silkscreen extent -12.75,-2.55 12.75,2.55, body extent -12.7,-2.45 12.7,4.92, height 5.08
CONN14_3220-14_CNC [mil]
  round 46 hole 30 paste-99999 mask+0: 1(0,0) 2(0,-50) 3(50,0) 4(50,-50) 5(100,0) 6(100,-50) 7(150,0) 8(150,-50) 9(200,0) 10(200,-50) 11(250,0) 12(250,-50) 13(300,0) 14(300,-50)
  silkscreen extent -90,-15 -60,15
CR_SMA_320-340AE_DIO [mil]
  rect 86x64 smd paste+0 mask+0: 1(-73,0) 2(73,0)
  silkscreen extent -180,-63 115,63
D0008A-IPC_A [mil]
  rect 97.21x24.49 smd paste+0 mask+0: 1(-95.02,75) 2(-95.02,25) 3(-95.02,-25) 4(-95.02,-75) 5(95.02,-75) 6(95.02,-25) 7(95.02,25) 8(95.02,75)
  silkscreen extent -170,-97 27,97, body extent -119,-96 119,96, height 64
DCK0005A_N [mm] "SOT23, 5-Leads, Body 2.15x1.4mm, Pitch 0.65mm, IPC Medium Density"
  rrect25% 0.85x0.4 smd: 1(-1.125,0.65) 2(-1.125,0) 3(-1.125,-0.65) 4(1.125,-0.65) 5(1.125,0.65)
  silkscreen extent -1.25,-1.1 0.3,1.52, body extent -1.14,-1 1.14,1, height 0.94
DGK0008A_N [mm] "TSOP, 8-Leads, Body 3.1x3.1mm, Pitch 0.65mm, IPC Medium Density"
  rrect22% 1.35x0.45 smd: 1(-2.225,0.975) 2(-2.225,0.325) 3(-2.225,-0.325) 4(-2.225,-0.975) 5(2.225,-0.975) 6(2.225,-0.325) 7(2.225,0.325) 8(2.225,0.975)
  silkscreen extent -2.35,-1.55 1.15,1.9, body extent -2.45,-1.5 2.45,1.5, height 0.94
FP-0603-L_1_6_0_15-W_0_8-IPC_C [mil]
  rect 33.77x33.94 smd paste+0 mask+0: 1(-23.71,0) 2(23.71,0)
  silkscreen extent -41,-34 41,34, body extent -45,-23 45,23, height 10
FP-AC0603-IPC_B [mil]
  rect 33.81x35.91 smd paste+0 mask+0: 1(-30.58,0) 2(30.58,0)
  silkscreen extent -47,-34 47,34, body extent -31,-16 31,16, height 22
FP-C0603C-CF-MFG [mm]
  rect 0.75x0.9 smd paste+0 mask+0: 1(-0.6,0) 2(0.6,0)
  silkscreen extent -0.87,-0.85 0.88,0.85, body extent -0.8,-0.4 0.8,0.4, height 0.87
FP-C1608-080-0_1-IPC_B [mil]
  rect 44.53x35.91 smd paste+0 mask+0: 1(-25.22,0) 2(25.22,0)
  silkscreen extent -47,-34 47,34, body extent -57,-28 57,28, height 10
FP-C3216-160-0_2-MFG [mm]
  rect 1.1x1.35 smd paste+0 mask+0: 1(-1.65,0) 2(1.65,0)
  silkscreen extent -0.72,-0.9 0.72,0.9, body extent -1.6,-0.8 1.6,0.8, height 1.8
FP-CC0402-MFG [mm]
  rect 0.5x0.5 smd paste+0 mask+0: 1(-0.5,0) 2(0.5,0)
  silkscreen extent -0.53,-0.68 0.53,0.67, body extent -0.87,-0.48 0.87,0.48, height 0.25
FP-CC0603-DA-MFG [mm]
  rect 0.8x0.9 smd paste+0 mask+0: 1(-0.75,0) 2(0.75,0)
  silkscreen extent -0.85,-0.85 0.85,0.85, body extent -1.35,-0.75 1.35,0.75, height 0.25
FP-CGA3E-0_3-0_1-IPC_B [mm]
  rect 0.756x1.106 smd paste+0 mask+0: 1(-0.925,0) 2(0.925,0)
  silkscreen extent -0.25,-0.55 0.25,0.55, body extent -0.8,-0.4 0.8,0.4, height 1.1
FP-CRCW0603-e3-IPC_A [mil]
  rect 44.69x41.82 smd paste+0 mask+0: 1(-32.1,0) 2(32.1,0)
  silkscreen extent -30,-37 30,37, body extent -31,-17 31,17, height 20
FP-CRCW0603-e3-IPC_C [mil]
  rect 28.94x33.94 smd paste+0 mask+0: 1(-24.23,0) 2(24.23,0)
  silkscreen extent -30,-33 30,33, body extent -43,-23 43,23, height 10
FP-DBV0005A-MFG [mm]
  rrect17% 1.1x0.6 smd paste+0 mask+0: 1(-1.3,0.95) 2(-1.3,0) 3(-1.3,-0.95) 4(1.3,-0.95) 5(1.3,0.95)
  silkscreen extent -2.55,-1.53 0.87,1.52, body extent -1.95,-1.78 1.95,1.78, height 0.25
FP-DEM8045C-MFG [mm]
  rect 1.75x3 smd paste+0 mask+0: 1(-3.375,0) 2(3.375,0)
  silkscreen extent -4.95,-4.15 4.15,4.15, body extent -4,-4 4,4, height 4.5
FP-ERTJ1-MFG [mm]
  rect 0.7x0.7 smd paste+0 mask+0: 1(-0.8,0) 2(0.8,0)
  silkscreen extent -1.2,-0.72 1.2,0.72, body extent -0.8,-0.4 0.8,0.4, height 0.9
FP-FKC-MFG [mm]
  rect 2.8x1.6 smd paste+0 mask+0: 1(-2.15,0) 2(2.15,0)
  silkscreen extent -4.22,-2.75 2.75,2.75, body extent -3,-2.65 3,2.65, height 6.1
FP-FKD-MFG [mm]
  rect 3.2x1.6 smd paste+0 mask+0: 1(-2.5,0) 2(2.5,0)
  silkscreen extent -4.85,-3.4 3.4,3.4, body extent -3.9,-3.3 3.9,3.3, height 6.1
FP-GRM15-MFG [mm]
  rect 0.4x0.5 smd paste+0 mask+0: 1(-0.4,0) 2(0.4,0)
  silkscreen extent -0.53,-0.63 0.53,0.63, body extent -0.7,-0.38 0.7,0.38, height 0.25
FP-GRM188-0_1-e0_2_0_5-IPC_B [mil]
  rect 37.74x35.91 smd paste+0 mask+0: 1(-28.61,0) 2(28.61,0)
  silkscreen extent -47,-34 47,34, body extent -57,-28 57,28, height 10
FP-GRM188-0_2-IPC_C [mil]
  rect 35.63x35.68 smd paste+0 mask+0: 1(-23.64,0) 2(23.64,0)
  silkscreen extent -41,-35 41,35, body extent -45,-24 45,24, height 10
FP-M20-9990846-MFG [mm]
  rect 1.57x1.57 hole 1.02 paste-2539.97 mask+0: 1(-8.89,0)
  round 1.57 hole 1.02 paste-2539.97 mask+0: 2(-6.35,0) 3(-3.81,0) 4(-1.27,0) 5(1.27,0) 6(3.81,0) 7(6.35,0) 8(8.89,0)
  silkscreen extent -11.13,-1.32 10.41,1.32, body extent -10.51,-1.42 10.51,1.42, height 0.25
FP-PG-TO252-3-MFG [mm]
  rect 1.5x2.5 smd paste+0 mask+0: 1(-2.3,-4.575) 3(2.3,-4.575)
  rect 7x7 smd paste+0 mask+0: 4(0,2.325)
  silkscreen extent -3.36,-2.28 3.36,-1.55, body extent -3.27,-5.21 3.27,5.21, height 2.38
FP-RC0603-0_55-IPC_C [mil]
  rect 25.93x31.97 smd paste+0 mask+0: 1(-26.64,0) 2(26.64,0)
  silkscreen extent -40,-33 40,33, body extent -44,-22 44,22, height 10
FP-RMCF0603-MFG [mm]
  rect 0.65x0.9 smd paste+0 mask+0: 1(-0.725,0) 2(0.725,0)
  silkscreen extent -0.85,-0.88 0.85,0.88, body extent -0.77,-0.4 0.77,0.4, height 0.55
FP-SOD123-MFG [mm]
  rect 0.9x0.95 smd paste+0 mask+0: 1(-1.575,0) 2(1.575,0)
  silkscreen extent -2.75,-0.85 0.75,0.85, body extent -2.12,-0.95 2.12,0.95, height 0.25
FP-SOT23-MFG [mm]
  rect 0.9x0.8 smd paste+0 mask+0: 1(-1,0.95) 2(-1,-0.95) 3(1,0)
  silkscreen extent -0.18,-1.5 0.7,1.5, body extent -1.55,-1.6 1.55,1.6, height 0.25
FP-SOT1176-1-MFG [mm]
  rect 0.2x0.475 smd paste+0 mask-1000: 1(1,0.387) 2(0.5,0.387) 3(0,0.387) 4(-0.5,0.387) 5(-1,0.387) 6(-1,-0.387) 7(-0.5,-0.387) 8(0,-0.387) 9(0.5,-0.387) 10(1,-0.387)
  silkscreen extent -1.3,-1.05 1.3,1.65, body extent -1.4,-0.77 1.4,0.77, height 0.25
GCT_USB4135-GF-A_REVA [mm]
  rect 0.7x1.2 smd: A5(-0.5,3.635) B5(0.5,3.635)
  rect 0.76x1.2 smd: A9(1.52,3.635) B9(-1.52,3.635)
  rect 0.8x1.2 smd: A12(2.75,3.635) B12(-2.75,3.635)
  rect 1.8x1.35 smd: S1(-5.125,3.58) S4(5.125,3.58)
  rect 1.8x1.5 smd: S2(-5.125,0) S3(5.125,0)
  silkscreen extent -4.47,-2.85 4.47,2.59, body extent -5.57,-2.85 5.57,4.05, height 3.25
NXP-SOT23_N [mm] "SOT23, 3-Leads, Body 3x1.4mm, Pitch 0.95mm, IPC Medium Density"
  rect 1.4x0.6 smd: 1(-0.95,0.95) 2(-0.95,-0.95) 3(0.95,0)
  silkscreen extent -1.07,-1.5 0.7,1.92, body extent -0.7,-1.5 0.7,1.5, height 1.1
OSC_ECS-3225MV-080-BN-TR [mm]
  rect 1.3x1.1 smd: 1(-1.15,-0.95) 2(1.15,-0.95) 3(1.15,0.95) 4(-1.15,0.95)
  silkscreen extent -2.37,-1.25 0.25,1.25, body extent -1.6,-1.25 1.6,1.25, height 1.2
PW0020A_L [mm] "SOP, 20-Leads, Body 6.6x4.5mm, Pitch 0.65mm, IPC High Density"
  rrect25% 1.2x0.4 smd: 1(-2.85,2.925) 2(-2.85,2.275) 3(-2.85,1.625) 4(-2.85,0.975) 5(-2.85,0.325) 6(-2.85,-0.325) 7(-2.85,-0.975) 8(-2.85,-1.625) 9(-2.85,-2.275) 10(-2.85,-2.925) 11(2.85,-2.925) 12(2.85,-2.275) 13(2.85,-1.625) 14(2.85,-0.975) 15(2.85,-0.325) 16(2.85,0.325) 17(2.85,0.975) 18(2.85,1.625) 19(2.85,2.275) 20(2.85,2.925)
  silkscreen extent -2.97,-3.3 1.85,3.8, body extent -3.21,-3.25 3.21,3.25, height 1
RESC1608X55X25ML10T15 [mm] "Chip Resistor, 2-Leads, Body 1.60x0.80mm, IPC Low Density"
  rect 0.8x1 smd: 1(-0.75,0) 2(0.75,0)
  body extent -0.85,-0.45 0.85,0.45, height 0.55
RESC1608X55X30ML15T15 [mm] "Chip Resistor, 2-Leads, Body 1.60x0.80mm, IPC Low Density"
  rect 0.9x1.05 smd: 1(-0.725,0) 2(0.725,0)
  body extent -0.87,-0.48 0.87,0.48, height 0.55
RESC1608X55X30ML20T20 [mm] "Chip Resistor, 2-Leads, Body 1.60x0.80mm, IPC Low Density"
  rect 1x1.1 smd: 1(-0.7,0) 2(0.7,0)
  body extent -0.9,-0.5 0.9,0.5, height 0.55
RESC1608X55X30NL20T10 [mm] "Chip Resistor, 2-Leads, Body 1.60x0.80mm, IPC Medium Density"
  rect 0.8x1 smd: 1(-0.7,0) 2(0.7,0)
  body extent -0.9,-0.5 0.9,0.5, height 0.55
RESC1609X50X30ML8T20 [mm] "Chip Resistor, 2-Leads, Body 1.65x0.95mm, IPC Low Density"
  rect 0.9x1.05 smd: 1(-0.7,0) 2(0.7,0)
  body extent -0.82,-0.48 0.82,0.48, height 0.5
RESC1609X50X30ML10T20 [mm] "Chip Resistor, 2-Leads, Body 1.55x0.85mm, IPC Low Density"
  rect 0.9x1.05 smd: 1(-0.675,0) 2(0.675,0)
  body extent -0.82,-0.48 0.82,0.48, height 0.5
RESC2013X50X40LL20T20 [mm] "Chip Resistor, 2-Leads, Body 2.00x1.25mm, IPC High Density"
  rect 0.95x1.35 smd: 1(-0.775,0) 2(0.775,0)
  body extent -1.1,-0.72 1.1,0.72, height 0.5
SOT-89_N [mm] "SOT89, 3-Leads, Body 4.5x2.4 mm, Pitch 1.5mm, Lead Span 4.1mm, IPC Medium Density"
  rect 1.4x0.6 smd: 1(-1.9,1.5) 3(-1.9,-1.5)
  rect 1.8x0.6 smd: 2(-1.7,0)
  oct 3.2x1.9 smd: 2(0.8,0)
  silkscreen extent -2.07,-2.3 1.3,2.47, body extent -1.3,-2.3 1.3,2.3, height 1.6
STM-LQFP32_M [mm] "QFP, 32-Leads, Body 7x7mm, Pitch 0.8mm, IPC Low Density"
  oval 1.95x0.6 smd: 1(-4.225,2.8) 2(-4.225,2) 3(-4.225,1.2) 4(-4.225,0.4) 5(-4.225,-0.4) 6(-4.225,-1.2) 7(-4.225,-2) 8(-4.225,-2.8) 17(4.225,-2.8) 18(4.225,-2) 19(4.225,-1.2) 20(4.225,-0.4) 21(4.225,0.4) 22(4.225,1.2) 23(4.225,2) 24(4.225,2.8)
  oval 0.6x1.95 smd: 9(-2.8,-4.225) 10(-2,-4.225) 11(-1.2,-4.225) 12(-0.4,-4.225) 13(0.4,-4.225) 14(1.2,-4.225) 15(2,-4.225) 16(2.8,-4.225) 25(2.8,4.225) 26(2,4.225) 27(1.2,4.225) 28(0.4,4.225) 29(-0.4,4.225) 30(-1.2,4.225) 31(-2,4.225) 32(-2.8,4.225)
  silkscreen extent -4.35,-2.85 2.85,3.77, body extent -3.5,-3.5 3.5,3.5, height 1.6
TO-252-3_ONS [mil]
  rect 45x120 smd paste+0 mask+0: 1(-89.96,-197.5) 3(89.96,-197.5)
  rect 217x233 smd paste+0 mask+0: 4(0,77)
  silkscreen extent -138,-168 138,128, body extent -133,-238 133,173, height 99
WCAP-ASLI_D6.3H7.7 [mm] "Aluminium Electrolytic V-Chip SMT Capacitors, 6.3x7.7mm"
  rect 3.5x1.6 smd: 1(2.8,0) 2(-2.8,0)
  silkscreen extent -3.4,-3.4 3.4,3.4, body extent -3.65,-3.3 3.65,3.3, height 7.7
WL-SMCW_0603_150060xx75000 [mm] "SMD Mono-color Chip LED, body 1.60 x 0.80 mm"
  rect 0.8x0.8 smd: 1(-0.8,0) 2(0.8,0)
  silkscreen extent -1.55,-0.4 -1.4,0.4, body extent -0.8,-0.4 0.8,0.4, height 0.7

## Part data
C1 C2 C6 C18 C21 C34 C_th: library part CMP-2100-03641-2, "CAP CER 0.1UF 16V X7R 0402", Capacitance=0.10μF, Manufacturer=Murata, Package=GRM15, Temperature="-55°C to +125°C", Temperature Characteristic=X7R, Temperature Range High=+125°C, Temperature Range Low=-55°C, Tolerance=10%, Voltage Rating=16Vdc, Category=Cap, ComponentLink2Description=Datasheet, ComponentLink2URL=https://search.murata.co.jp/Ceramy/image/img/A01X/G101/ENG/GRM155R71H471KA01-01A.pdf, Device Class L1="Passive Components", Device Class L2=Capacitors, Device Class L3="Ceramic Capacitors", Digikey Description="CAP CER 0.1UF 16V X7R 0402", Height=0.55mm, Ipc Land Pattern Name=CAPC10050X219, Lead Free=yes, Manufacturer Part Number=GRM155R71C104KA88D, Material=Ceramic, Mouser Description="0402 0.1 uF 16V ±10 % Tolerance X7R SMT Multilayer Ceramic Capacitor", Octopart=https://octopart.com/grm155r71c104ka88d-murata-196880, RoHS=TRUE, Standoff Height=0mm
C3: library part CMP-2006-02545-2, "Chip Multilayer Ceramic Capacitors for General Purpose, 0603, 4.7uF, X5R, 15%, 10%, 35V", Capacitance=4.7uF, Case Code (Imperial)=0603, Case Code (Metric)=1608, Dielectric=X5R, Max Operating Temperature=85°C, Min Operating Temperature=-55°C, Package Quantity=4000, Resistor Type=Ceramic, Tolerance=10%, Voltage=35V, Case/Package=0603, Depth=0.8mm, Height=0.8mm, Lead Free="Lead Free", Length=1.6mm, Material=Ceramic, Mount="Surface Mount", Packaging="Tape and Reel", REACH SVHC="No SVHC", Termination=SMD/SMT, Thickness=0.031inch, Voltage Rating=35V, Voltage Rating (DC)=35V, Weight=0.000222oz, Width=0.8mm
C4 C19 C35: library part CMP-2000-06025-2, "Multilayer Ceramic Capacitors 1μF ±10% 50V X5R SMD 0603", Capacitance=1uF, Case Code (Imperial)=0603, Case Code (Metric)=1608, Dielectric=X5R, Dielectric Material=Ceramic, Max Operating Temperature=85°C, Min Operating Temperature=-55°C, Package Quantity=1, Tolerance=10%, Voltage=50V, Case/Package=0603, Construction=Flat, Depth=0.8mm, Height=0.8mm, Lead Free="Lead Free", Length=1.6mm, Mount="Surface Mount", Number of Pins=2, Packaging="Tape and Reel", Radiation Hardening=No, REACH SVHC="No SVHC", Resistor Type=Ceramic, RoHS Compliant=Yes, Series=C, Termination=SMD/SMT, Thickness=0.035inch, Voltage Rating=50V, Voltage Rating (DC)=50V, Weight=7.1E-05oz, Width=0.031inch
C5: library part CMP-2100-03600-2, "CAP CER 10000PF 50V X7R 0603", Capacitance="10 nF", Manufacturer=YAGEO, Package=CC0603-DA, Temperature="-55°C to +125°C", Temperature Characteristic=X7R, Temperature Coefficient=15%, Temperature Range High=+125°C, Temperature Range Low=-55°C, Tolerance=0.1, Voltage="50 V", Automotive=No, Category=Cap, ComponentLink2Description=Datasheet, ComponentLink2URL=http://www.yageo.com/documents/recent/UPY-GPHC_X7R_6.3V-to-50V_18.pdf, Device Class L1="Passive Components", Device Class L2=Capacitors, Device Class L3="Ceramic Capacitors", Digikey Description="CAP CER 10000PF 50V X7R 0603", Footprint Url=http://www.yageo.com/exep/pages/download/literatures/UPY-C_GEN_24.pdf, Height=0.9mm, Lead Free=Yes, Manufacturer Part Number=CC0603KRX7R9BB103, Material=Ceramic, Mouser Description="Multilayer Ceramic Capacitor, CC Series, 0.01 - F, - 10%, X7R, 50 V, 0603 [1608 Metric]", Octopart=https://octopart.com/cc0603krx7r9bb103-yageo-192938, RoHS=TRUE, Voltage Rating="50 V"
C9: library part CMP-2006-02494-2, "Chip Multilayer Ceramic Capacitors for General Purpose, 0603, 2000pF, C0G, 30ppm/°C, 5%, 50V", Capacitance=2nF, Case Code (Imperial)=0603, Case Code (Metric)=1608, Dielectric=C0G, Max Operating Temperature=125°C, Min Operating Temperature=-55°C, Package Quantity=1, Tolerance=5%, Voltage=50V, Case/Package=0603, Depth=0.8mm, Height=0.8mm, Lead Free="Lead Free", Length=1.6mm, Material=Ceramic, Mount="Surface Mount", Packaging="Tape and Reel", Radiation Hardening=No, REACH SVHC="No SVHC", Termination=SMD/SMT, Thickness=0.035inch, Voltage Rating=50V, Voltage Rating (DC)=50V, Width=0.8mm
C10 C36: library part CMP-03422-000989-1, "CAP CER 1000PF 25V X7R 0402", Capacitance="1.0 nF", Manufacturer=YAGEO, Package=CC0402, Temperature="-55°C to +125°C", Temperature Characteristic=X7R, Temperature Coefficient=30ppm/°C, Temperature Range High=+125°C, Temperature Range Low=-55°C, Tolerance=0.1, Voltage Rating="25 V", Automotive=No, Automotive Grade=NA, Category=Cap, ComponentLink2Description=Datasheet, ComponentLink2URL=http://www.yageo.com/documents/recent/UPY-GP_NP0_16V-to-50V_16.pdf, Device Class L1="Passive Components", Device Class L2=Capacitors, Device Class L3="Ceramic Capacitors", Digikey Description="CAP CER 1000PF 25V X7R 0402", Footprint Url=http://www.yageo.com/exep/pages/download/literatures/UPY-C_GEN_24.pdf, Height=0.55mm, Ipc Land Pattern Name=CAPC10050X50, Lead Free=Yes, Manufacturer Part Number=CC0402KRX7R8BB102, Material=Ceramic, Mouser Description="Multilayer Ceramic Capacitors MLCC - SMD/SMT 1.0nF 25V X7R 10%", Octopart=https://octopart.com/cc0402krx7r8bb102-yageo-12885104, RoHS=TRUE
C11 C12 C13 C14 C15 C16: library part CMP-2000-07531-4, "Ceramic Capacitor General Use 1uF ±10% 50V X7R 0603", Capacitance=1uF, Case Code (Imperial)=0603, Case Code (Metric)=1608, Dielectric=X7R, Max Operating Temperature=125°C, Min Operating Temperature=-55°C, Package Quantity=1, Tolerance=10%, Voltage Rating=50V, Case/Package=0603, Construction=Flat, Depth=0.8mm, Halogen Free="Halogen Free", Height=0.8mm, Length=1.6mm, Mount="Surface Mount", Packaging="Tape and Reel", Radiation Hardening=No, RoHS Compliant=Yes, Series=M, Termination=SMD/SMT, Thickness=0.037inch, Voltage Rating (DC)=50V, Width=0.031inch
C17: library part CMP-08246-006999-1, "Multilayer Ceramic Capacitors 10uF ±20% 50V X5R SMD 1206", Capacitance=10uF, Case Code (Imperial)=1206, Case Code (Metric)=3216, Dielectric=X5R, Dielectric Material=Ceramic, Max Operating Temperature=85°C, Min Operating Temperature=-55°C, Package Quantity=1, Tolerance=20%, Voltage Rating=50V, Case/Package=1206, Construction=Flat, Depth=1.6mm, Height=1.6mm, Lead Free="Lead Free", Length=3.2mm, Mount="Surface Mount", Packaging="Tape and Reel", Radiation Hardening=No, REACH SVHC="No SVHC", Resistor Type=Ceramic, RoHS Compliant=Yes, Series=C, Termination=SMD/SMT, Thickness=0.071inch, Voltage Rating (DC)=50V, Weight=0.000571oz, Width=0.063inch
C20: library part CMP-08246-003263-1, "Cap Ceramic 330nF 50V X7R 10% Pad SMD 0603 +125°C Automotive T/R", Capacitance=330nF, Case Code (Imperial)=0603, Case Code (Metric)=1608, Dielectric=X7R, Max Operating Temperature=125°C, Min Operating Temperature=-55°C, Package Quantity=4000, Ratings=AEC-Q200, Tolerance=10%, Voltage Rating=50V, Case/Package=0603, Height=0.8mm, Length=0.063inch, Mount="Surface Mount", Packaging="Tape and Reel", RoHS Compliant=Yes, Termination=SMD/SMT, Thickness=0.035inch, Voltage Rating (DC)=50V, Weight=7.1E-05oz, Width=0.031inch
C22 C30: library part CMP-03913-54202496-1, "865080545012 Cap Aluminum Lytic 100uF 35V 20% (6.3 X 7.7mm) SMD 300mA 2000h 105C T/R", Capacitance=100µF, Case/Package=Radial, ESR (Equivalent Series Resistance)=321.392mΩ, Insulation Resistance=1MΩ, Leakage Current=35µA, Max Operating Temperature=105°C, Min Operating Temperature=-55°C, Ripple Current=300mA, Tolerance=20%, Voltage Rating=35V, Diameter=6.3mm, Dissipation Factor=14%, Height=7.7mm, Impedance=380mΩ, Length=7.7mm, Life (Hours)=2000hours, NexarPartId=54202496, Packaging="Cut Tape", REACH SVHC=Unknown, Ripple Current (AC)=300mA, RoHS=Compliant, Voltage Rating (DC)=35V, Width=6.6mm
C23 C28: library part CMP-2000-06209-2, "CAP ALUM 22UF 20% 50V SMD", Capacitance=22uF, Case/Package=Radial, Dielectric Material=Aluminium, ESR (Equivalent Series Resistance)=880mR, Leakage Current=3uA, Max Operating Temperature=105°C, Min Operating Temperature=-55°C, Package Quantity=1000, Ripple Current=165mA, Tolerance=20%, Voltage=50V, Construction=Cylindrical, Contact Plating=Tin, Diameter=6.3mm, Height=5.8mm, Height - Seated (Max)=0.24inch, Impedance=880mR, Lead Free="Lead Free", Length=5.8mm, Life (Hours)=2000Hour, Mount="Surface Mount", Number of Pins=2, Packaging="Tape and Reel", Polarity=Polar, Radiation Hardening=No, REACH SVHC="No SVHC", Ripple Current (AC)=165mA, RoHS Compliant=Yes, Series=FK, Termination=SMD/SMT, Voltage Rating=50V, Voltage Rating (DC)=50V, Width=7.8mm
C24 C31: library part CMP-05427-000030-1, "CAP ALUM 10UF 20% 50V SMD", Capacitance=10uF, Case/Package=Radial, Dielectric Material=Aluminium, ESR (Equivalent Series Resistance)=1.52R, Leakage Current=3uA, Max Operating Temperature=105°C, Min Operating Temperature=-55°C, Package Quantity=1000, Ripple Current=85mA, Tolerance=20%, Voltage=50V, Construction=Cylindrical, Contact Plating=Tin, Diameter=5mm, Height=5.8mm, Height - Seated (Max)=0.228inch, Impedance=1.52R, Lead Free="Lead Free", Length=5.8mm, Life (Hours)=2000Hour, Material=Aluminium, Mount="Surface Mount", Number of Pins=2, Packaging="Tape and Reel", Radiation Hardening=No, REACH SVHC="No SVHC", Ripple Current (AC)=85mA, RoHS Compliant=Yes, Series=FK, Termination=SMD/SMT, Voltage Rating=50V, Voltage Rating (DC)=50V, Width=6.5mm
C25 C29: library part CMP-2006-03061-2, "CAP CER 0.1UF 50V X7R 0603", Capacitance="0.10 μF", Manufacturer=KEMET, Package=C0603C-CF, Temperature="-55°C to +125°C", Temperature Characteristic=X7R, Temperature Coefficient=30ppm/°C, Temperature Range High=+125°C, Temperature Range Low=-55°C, Tolerance=0.1, Voltage Rating="50 V", Automotive=Yes, Automotive Grade="Grade 1", Category=Cap, ComponentLink2Description=Datasheet, ComponentLink2URL=https://api.kemet.com/component-edge/download/datasheet/C0603C100J5GACAUTO.pdf, Device Class L1="Passive Components", Device Class L2=Capacitors, Device Class L3="Ceramic Capacitors", Digikey Description="CAP CER 0.1UF 50V X7R 0603", Height=0.87mm, Lead Free=Yes, Manufacturer Part Number=C0603C104K5RACTU, Material=Ceramic, Octopart=https://octopart.com/c0603c104k5ractu-kemet-139244, RoHS=TRUE
C26 C32: library part CMP-03020-028971-1, "C0603 0.10 μF X7R 30ppm/°C 20.00% 50 V", Capacitance="0.10 μF", Manufacturer=KEMET, Package=C0603C-CF, Temperature="-55°C to +125°C", Temperature Characteristic=X7R, Temperature Coefficient=30ppm/°C, Temperature Range High=+125°C, Temperature Range Low=-55°C, Tolerance=0.2, Voltage Rating="50 V", Automotive=Yes, Automotive Grade="Grade 1", Category=Cap, ComponentLink2Description=Datasheet, ComponentLink2URL=https://api.kemet.com/component-edge/download/datasheet/C0603C100J5GACAUTO.pdf, Device Class L1="Passive Components", Device Class L2=Capacitors, Device Class L3="Ceramic Capacitors", Height=0.87mm, Lead Free=Yes, Manufacturer Part Number=C0603C104M5RACAUTO, Material=Ceramic, Mouser Description="Cap Ceramic 0.1uF 50V X7R 20% SMD 0603 125°C Paper T/R", Octopart=https://octopart.com/c0603c104m5racauto-kemet-75146604, RoHS=TRUE
C27 C33: library part CMP-2006-03408-2, "CAP CER 100PF 50V C0G/NP0 0603", Capacitance="100 pF", Manufacturer=KEMET, Package=C0603C-CF, Temperature="-55°C to +125°C", Temperature Characteristic=C0G, Temperature Coefficient=30ppm/°C, Temperature Range High=+125°C, Temperature Range Low=-55°C, Tolerance=0.05, Voltage Rating="50 V", Automotive=Yes, Automotive Grade="Grade 1", Category=Cap, ComponentLink2Description=Datasheet, ComponentLink2URL=https://api.kemet.com/component-edge/download/datasheet/C0603C100J5GACAUTO.pdf, Device Class L1="Passive Components", Device Class L2=Capacitors, Device Class L3="Ceramic Capacitors", Digikey Description="CAP CER 100PF 50V C0G/NP0 0603", Height=0.87mm, Lead Free=Yes, Manufacturer Part Number=C0603C101J5GACTU, Material=Ceramic, Mouser Description="Multilayer Ceramic Capacitor, C Series, 100 Pf, - 5%, C0g / Np0, 50 V, 0603 [1608 Metric] Rohs Compliant: Yes", Octopart=https://octopart.com/c0603c101j5gactu-kemet-100052, RoHS=TRUE
CR1 CR2: "No Description Available", Mfr_Name="Diodes Inc"
D1: library part CMP-1426-00006-7, "WURTH ELEKTRONIK - 150060VS75000 - LED, Green, SMD, 0603, 30 mA, 2 V, 570 nm", Case Code (Imperial)=0603, Case Code (Metric)=1608, Color=Green, Forward Current=100mA, Forward Voltage=2V, Max Junction Temperature (Tj)=95°C, Max Operating Temperature=85°C, Max Reverse Voltage (DC)=5V, Min Operating Temperature=-40°C, Power Dissipation=72mW, Test Current=20mA, Case/Package=0603, Dominant Wavelength=570nm, Height=700µm, Length=1.6mm, Lens Style="Clear, Rectangular", Luminous Intensity=40mcd, Mount="Surface Mount", Number of Pins=2, Packaging="Tape and Reel", Peak Wavelength=572nm, REACH SVHC=Unknown, Reverse Voltage=5V, RoHS=Compliant, Viewing Angle=140°, Wavelength=570nm, Width=800µm
D2: library part CMP-1426-00004-3, "Led, Red, 630 Nm, 1.9 V, 30 Ma, 60 Mcd Rohs Compliant: Yes", Case Code (Imperial)=0603, Case Code (Metric)=1608, Color=Red, Forward Current=100mA, Forward Voltage=1.9V, Max Operating Temperature=85°C, Max Reverse Voltage (DC)=5V, Min Operating Temperature=-40°C, Test Current=20mA, Case/Package=0603, Dominant Wavelength=630nm, Height=700µm, Length=1.6mm, Lens Style="Clear, Rectangular", Luminous Intensity=60mcd, Mount="Surface Mount", Packaging="Tape and Reel", Peak Wavelength=645nm, REACH SVHC=Unknown, RoHS=Compliant, Viewing Angle=140°, Wavelength=630nm, Width=800µm
D3: library part CMP-12790-000026-1, "DIODE SCHOTTKY 20V 500MA SOD123", Capacitance=170pF, Forward Current=0.5A, Manufacturer="Diodes Inc.", Max Junction Temp=+125°C, Max Repetitive Reverse Voltage=20V, Max Surge Forward Current=5.5A, Package=SOD123, Peak Reverse Current=250uA, Temperature="-65°C to +125°C", Temperature Range Low=-65°C, Automotive=No, Category=Diode, ComponentLink2Description=Datasheet, ComponentLink2URL=https://www.diodes.com/assets/Datasheets/ds30051.pdf, Device Class L1="Discrete Semiconductors", Device Class L2=Diodes, Device Class L3="Schottky Diodes", Digikey Description="DIODE SCHOTTKY 20V 500MA SOD123", Footprint Url=https://www.diodes.com/assets/Package-Files/SOD123.pdf, Height=1.45mm, Ipc Land Pattern Name=SOD365155X123-2, Lead Free=Yes, Manufacturer Part Number=B0520LW-7-F, Mouser Description="Schottky Diodes & Rectifiers 20V 410mW", Octopart=https://octopart.com/b0520lw-7-f-diodes+inc.-325707, Reverse Voltage=20V, RoHS=TRUE, Standoff Height=0mm, Temperature Range High=+125°C
D4 D5: library part CMP-14432-000005-1, "TVS DIODE 3.3VWM 3VC DFN2510A-10", RoHS Compliant=Yes
J1: library part CMP-15831-000033-1, "CONN HEADER VERT 8POS 2.54MM", Case/Package=SIL, Color=Black, Contact Resistance=30mR, Current Rating=3A, Insulation Resistance=1GR, Max Operating Temperature=105°C, Min Operating Temperature=-40°C, Package Quantity=1000, Connector Type="Male Pin", Contact Material=Brass, Contact Mating Length=0.24inch, Contact Plating=Tin, Contact Type="Male Pin", Depth=2.54mm, Gender=Male, Housing Color=Black, Housing Material=Nylon, Length=20.32mm, Max Current Rating=3A, Mount="Through Hole", Number Of Contacts=8, Number of Positions=8, Number of Rows=1, Orientation=Straight, Packaging=Bulk, Pitch=2.54mm, Radiation Hardening=No, REACH SVHC="No SVHC", RoHS Compliant=Yes, Series=M20, Termination=Solder
J2: "No Description Available", Mfr_Name="CNC Tech", RefDes=RefDes, Type="Headers, Male Pins"
J3: "USB CONN, TYPE C, R/A RCPT, 6POS, SMT; USB Connector Type:USB Type C; USB Standard:-; Gender:Receptacle; No. of Positions:6Positions; Connector Mounting:Surface Mount; Orientation:Right Angle; Contact 26AK7776", Package=None, Check_prices=https://www.snapeda.com/parts/USB4135GFA/Global+Connector+Technology/view-part/?ref=eda, MF="Global Connector Technology", MP=USB4135GFA, SnapEDA_Link=https://www.snapeda.com/parts/USB4135GFA/Global+Connector+Technology/view-part/?ref=snap
L1 L2: library part CMP-06042-011831-1, "Shielded Wirewound Inductor 15uH 20% 3500mA 0.0528Ω SMD", Case/Package=SMD/SMT, Current Rating=3.5A, DC Resistance (DCR)=52.8mR, Inductance=15uH, Resistor Type=Wirewound, Saturation Current=3.3A, Test Frequency=100kHz, Tolerance=20%, Core Material=Ferrite, Height - Seated (Max)=0.177inch, Length=0.315inch, Max DC Current=3.5A, Mount="Surface Mount", Number of Pins=2, Packaging="Tape and Reel", Shielding=Shielded, Width=0.315inch
P1: library part CMP-03913-122639960-1, "62703021721 Conn, R/A Header, 30Pos, 2Row, 1.27Mm Rohs Compliant: Yes", Current Rating=1A, Insulation Resistance=1GΩ, Max Operating Temperature=105°C, Min Operating Temperature=-40°C, Length=23.82mm, NexarPartId=122639960, Number of Pins=30, Pitch=1.27mm, RoHS=Compliant
Q1: library part CMP-1259-00086-1, "P-Channel Trench MOSFET, -50 V, -0.18 A, -55 to 150 degC, 3-Pin SOT23, Tape and Reel", Manufacturer="NXP Semiconductors", Automotive Qualified=Y, Channel Type=P, Code_JEDEC=TO-236AB, ComponentLink1Description="Manufacturer URL", ComponentLink1URL=http://www.nxp.com/, ComponentLink2Description=Datasheet, ComponentLink2URL=http://www.nxp.com/documents/data_sheet/BSS84AK.pdf, ComponentLink3Description="Package Specification", ComponentLink3URL=http://www.nxp.com/documents/outline_drawing/sot023_po.pdf, DatasheetVersion="Rev. 1", ID [max] (A)=-0.18, IDM [max] (A)=-0.7, Mounting Technology="Surface Mount", PackageDescription="3-Pin Small Outline Transistor Package, Body 2.9 x 1.3 mm, Pitch 0.95 mm", PackageReference=SOT23, PackageVersion="06-03-16, 03/2006", Packing="Tape & Reel", PartNumber=BSS84AK,215, VDS [max] (V)=-50, VGSth [typ] (V)=-1.6
Q2: library part CMP-2000-04929-2, "MOSFET N-CH 60V 115MA SOT23-3", Case/Package=SOT-23, Continuous Drain Current (ID)=115mA, Drain To Source Breakdown Voltage=70V, Drain To Source Resistance=7.5R, Drain to Source Voltage (Vdss)=60V, Gate to Source Voltage (Vgs)=20V, Input Capacitance=50pF, Max Operating Temperature=150°C, Max Power Dissipation=300mW, Min Operating Temperature=-55°C, Package Quantity=3000, Power Dissipation=540mW, Threshold Voltage=2.5V, Contact Plating=Tin, Current Rating=115mA, Dual Supply Voltage=60V, Element Configuration=Single, Fall Time=5.6ns, Height=1mm, Lead Free="Lead Free", Length=2.9mm, Mount="Surface Mount", Nominal Vgs=2.5V, Number Of Channels=1, Number of Elements=1, Number of Pins=3, On-State Resistance=7.5R, Packaging="Tape and Reel", Radiation Hardening=No, Rds On Max=7.5R, REACH SVHC="No SVHC", Rise Time=3ns, Termination=SMD/SMT, Turn-Off Delay Time=11ns, Turn-On Delay Time=7ns, Voltage=60V, Voltage Rating (DC)=60V, Weight=0.000282oz, Width=1.3mm
Q3 Q4: library part CMP-32901-000043-2, "MOSFET P-CH 55V 11A DPAK", Case/Package=TO-252-3, Continuous Drain Current (ID)=11A, Drain To Source Breakdown Voltage=-55V, Drain To Source Resistance=175mR, Gate to Source Voltage (Vgs)=20V, Input Capacitance=350pF, Max Operating Temperature=150°C, Max Power Dissipation=38W, Min Operating Temperature=-55°C, Threshold Voltage=-4V, Contact Plating=Tin, Drain to Source Voltage (Vdss)=-55V, Halogen Free="Halogen Free", Height=0.094inch, Lead Free="Contains Lead", Max Dual Supply Voltage=-55V, Mount="Surface Mount", Number of Pins=3, Packaging="Tape and Reel", Power Dissipation=38W, Rds On Max=175mR, REACH SVHC="No SVHC", Rise Time=55ns, RoHS Compliant=Yes, Turn-Off Delay Time=23ns, Turn-On Delay Time=13ns, Width=0.245inch
R1 R2 R3 R18 R22 R29 R_th: library part CMP-2100-03664-2, "RES 10K OHM 1% 1/10W 0603", Case Code (Imperial)=0603, Case Code (Metric)=1608, Max Operating Temperature=155°C, Max Power Dissipation=100mW, Min Operating Temperature=-55°C, Resistance=10kR, Resistance Tolerance=1%, Resistor Type="Thick Film", Temperature Coefficient=100ppm/°C, Voltage Rating=75V, Voltage Rating (DC)=50V, Case/Package=0603, Construction=Rectangular, Depth=0.8mm, Features="Moisture Resistant", Height=0.45mm, Lead Free="Lead Free", Lead Pitch=0.3mm, Length=1.6mm, Military Standard=Not, Number of Pins=2, Number of Terminations=2, Packaging="Tape and Reel", Power Rating=100mW, RoHS Compliant=Yes, Series=RC, Size Code=0603, Termination=SMD/SMT, Tolerance=1%, Weight=7.1E-05oz, Width=0.8mm
R4 R5: library part CMP-1666-00019-3, "RES Thick Film, 4.7kΩ, 1%, 0.1W, 100ppm/°C, 0603", Case Code (Imperial)=0603, Case Code (Metric)=1608, Max Operating Temperature=155°C, Min Operating Temperature=-55°C, Package Quantity=5000, Power Rating=100mW, Resistance=4.7kR, Temperature Coefficient=100ppm/°C, Tolerance=1%, Voltage Rating=75V, Case/Package=0603, Composition="Thick Film", Contact Plating=Tin, Depth=0.85mm, Height=0.45mm, Lead Free="Lead Free", Length=1.55mm, Military Standard=Not, Mount="Surface Mount", Packaging="Tape and Reel", Termination=SMD/SMT, Voltage Rating (DC)=75V, Weight=7.1E-05oz, Width=0.85mm